# EAGLE board darwin-radio-panel3 (EAGLE 9.5.0)
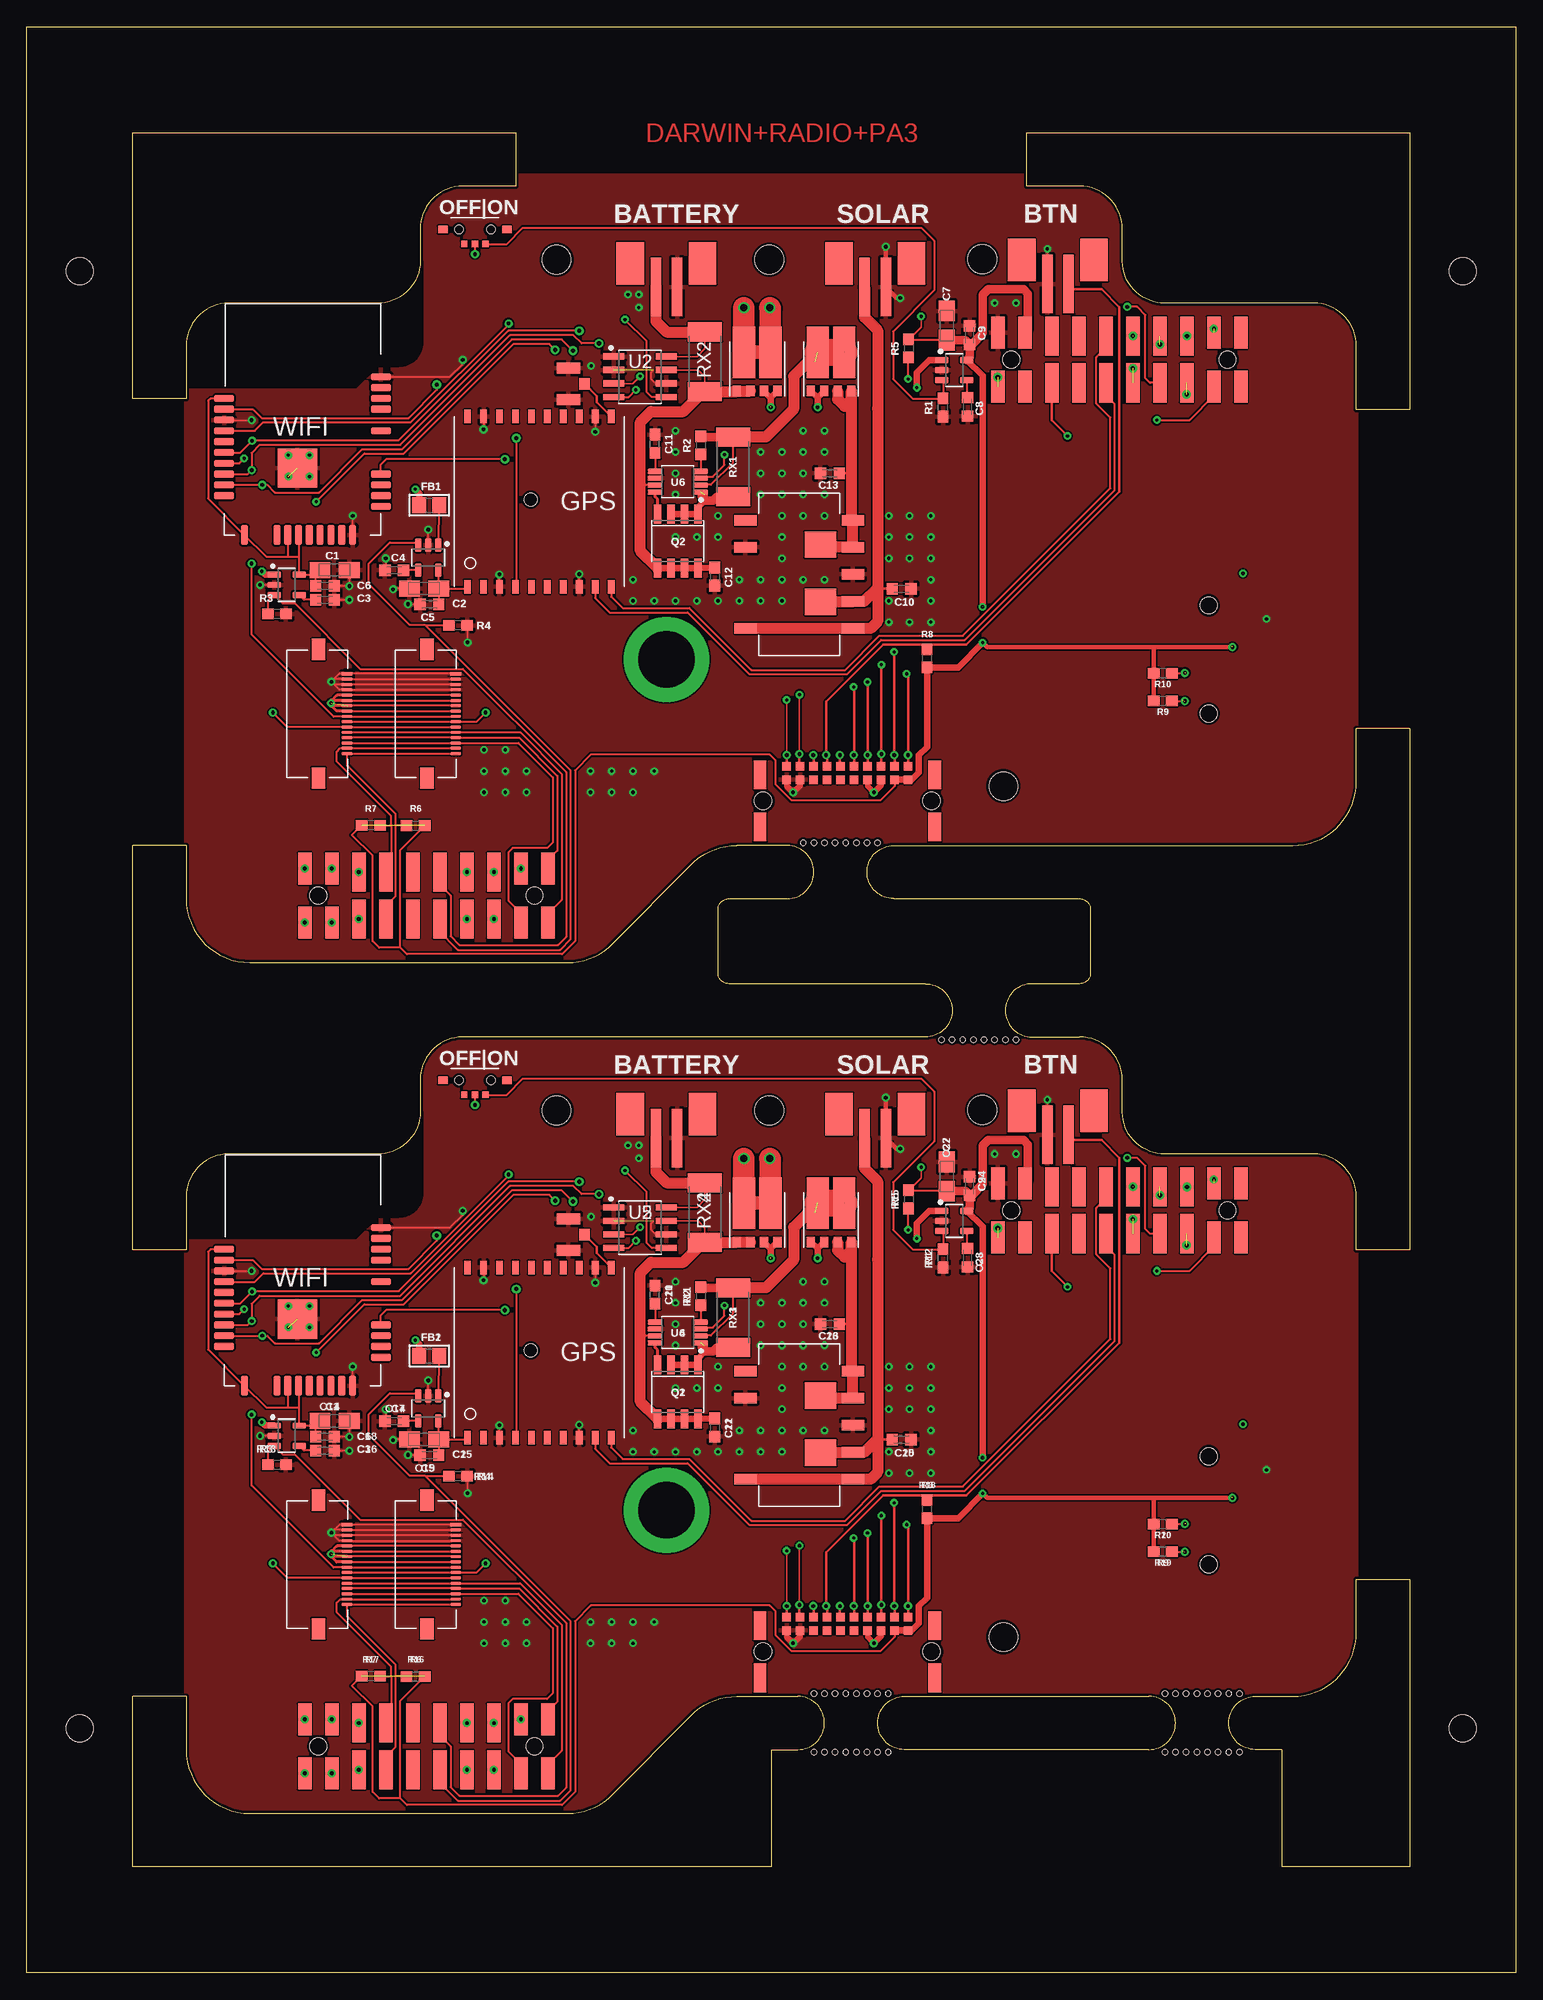
[diagram p0: board, top side]
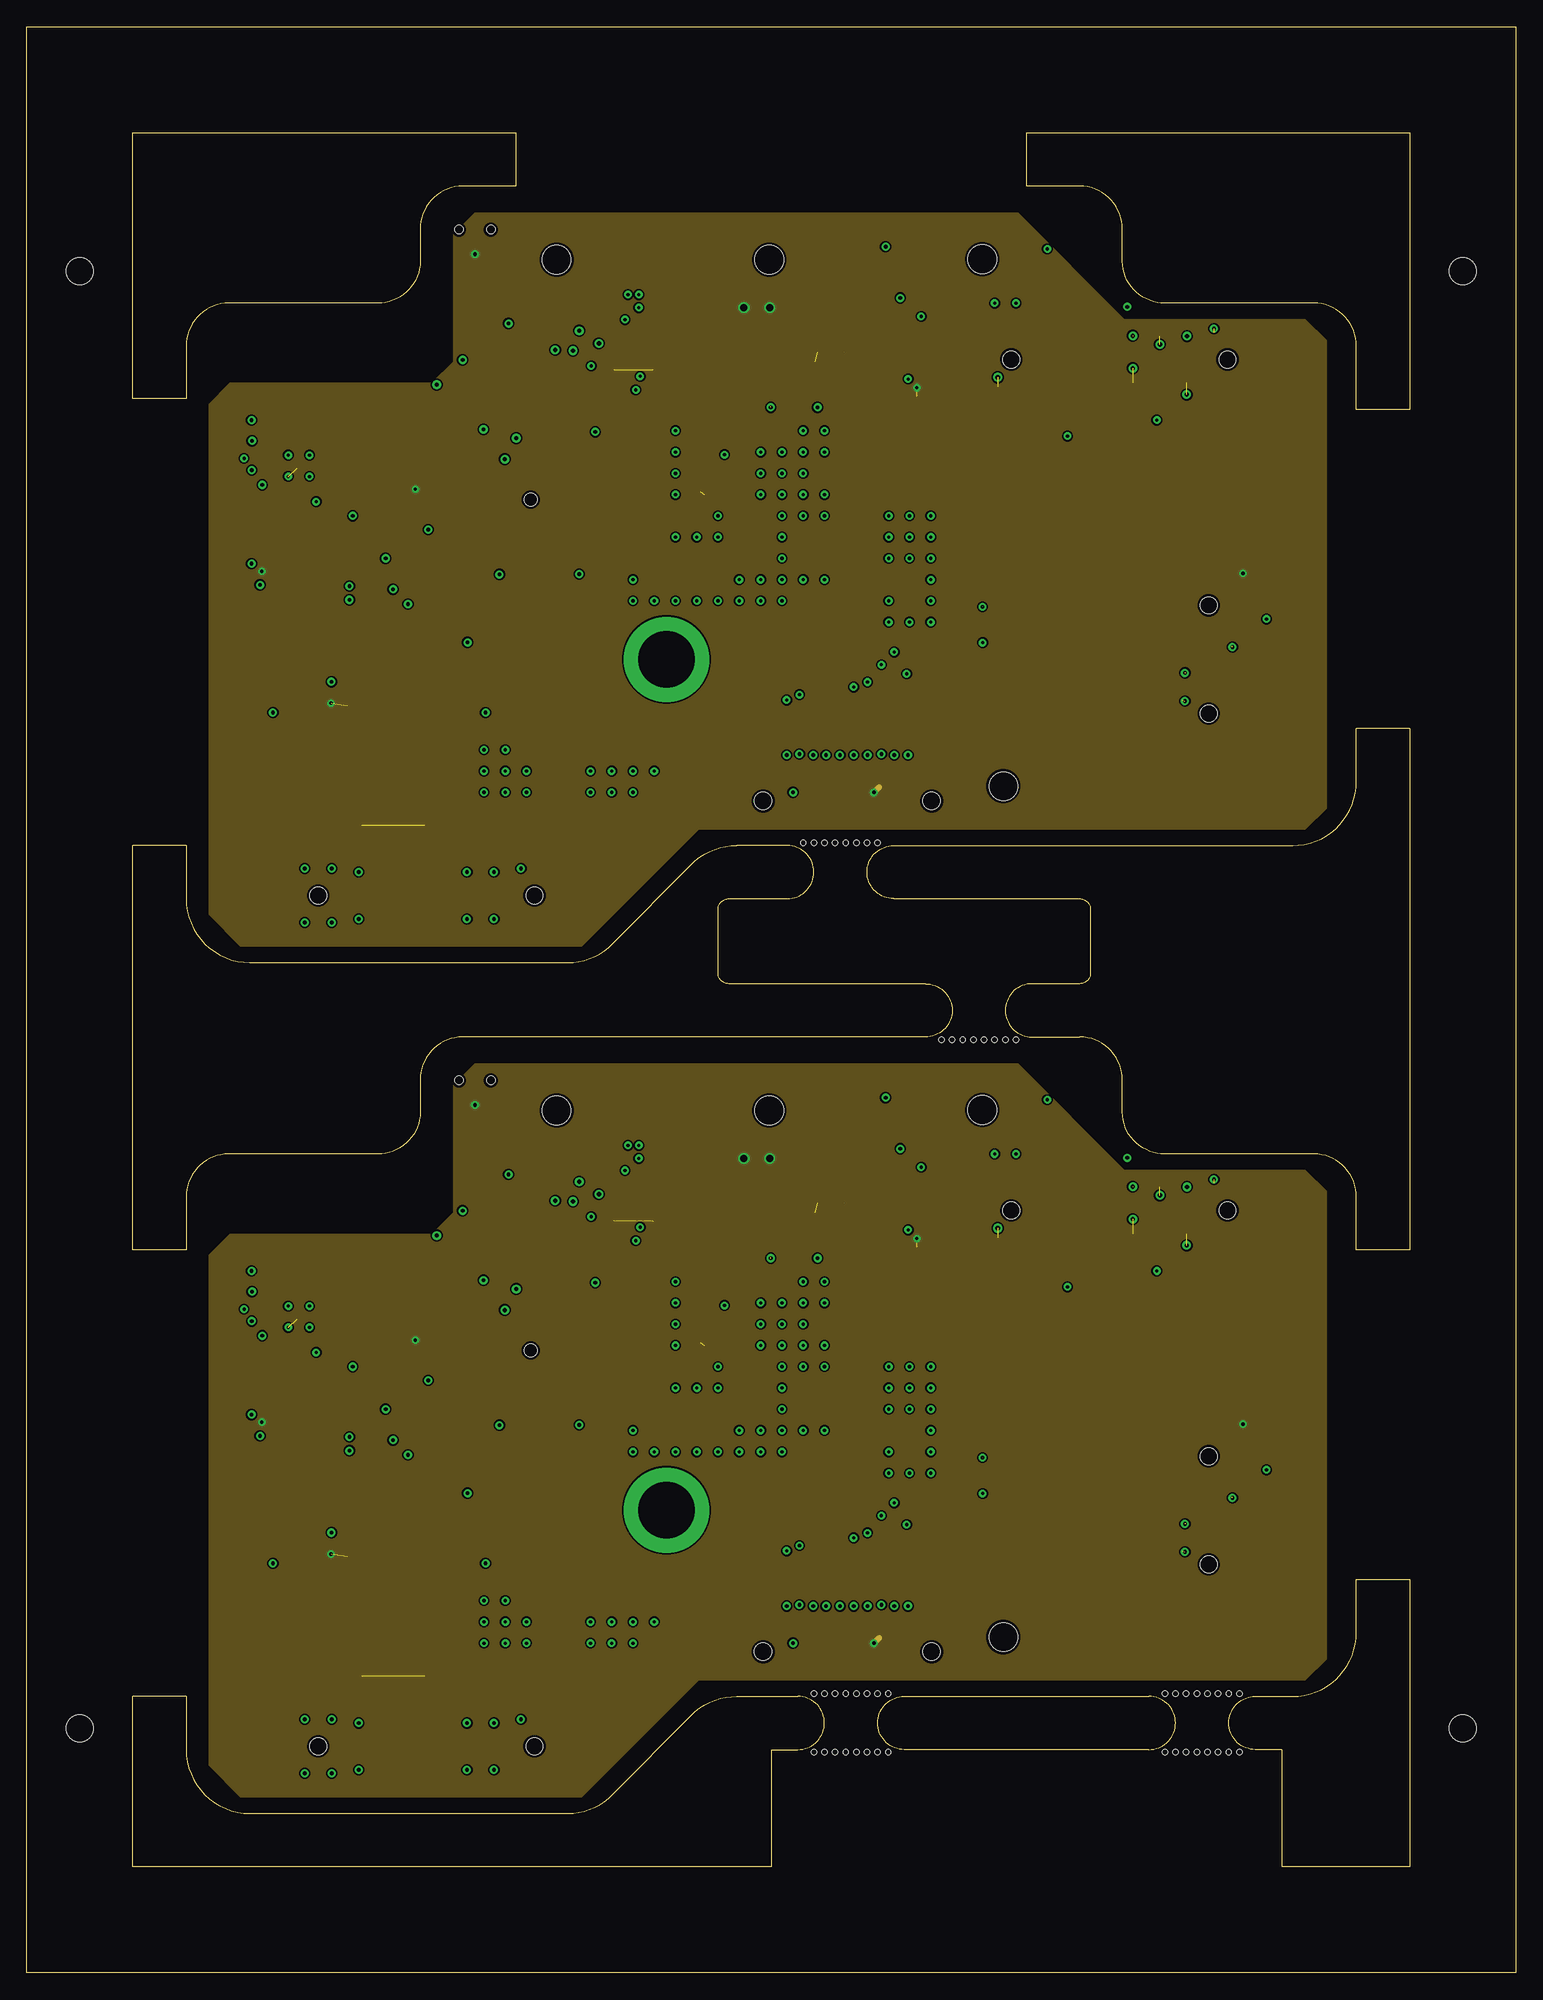
[diagram p1: board, inner layer PWR]
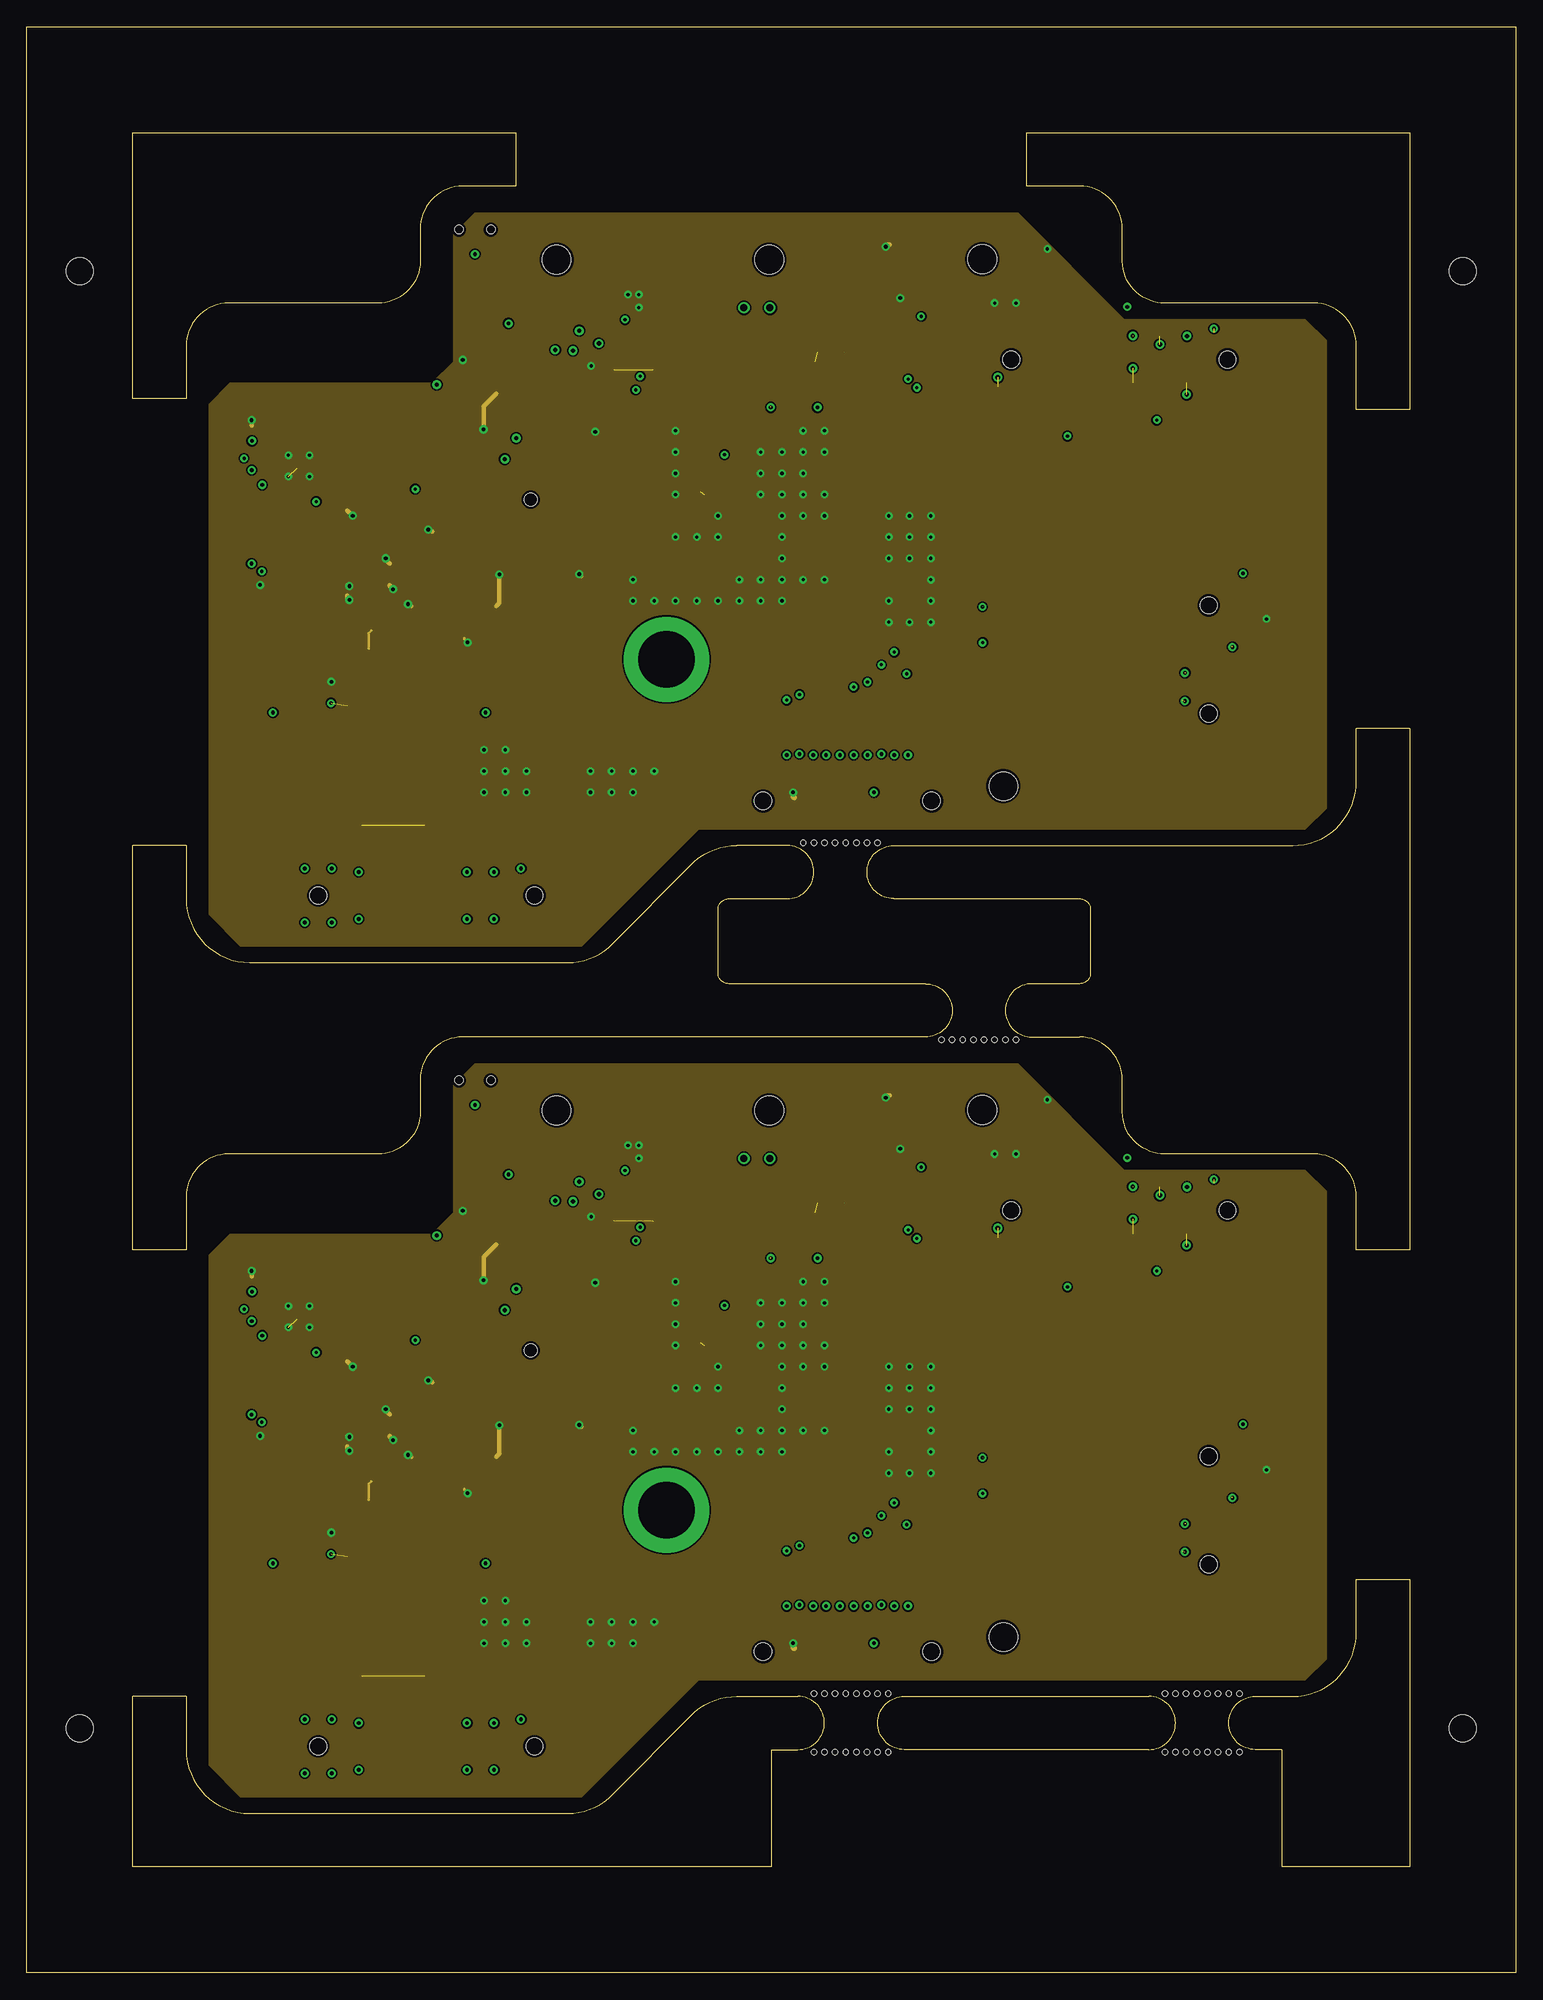
[diagram p2: board, inner layer GND]
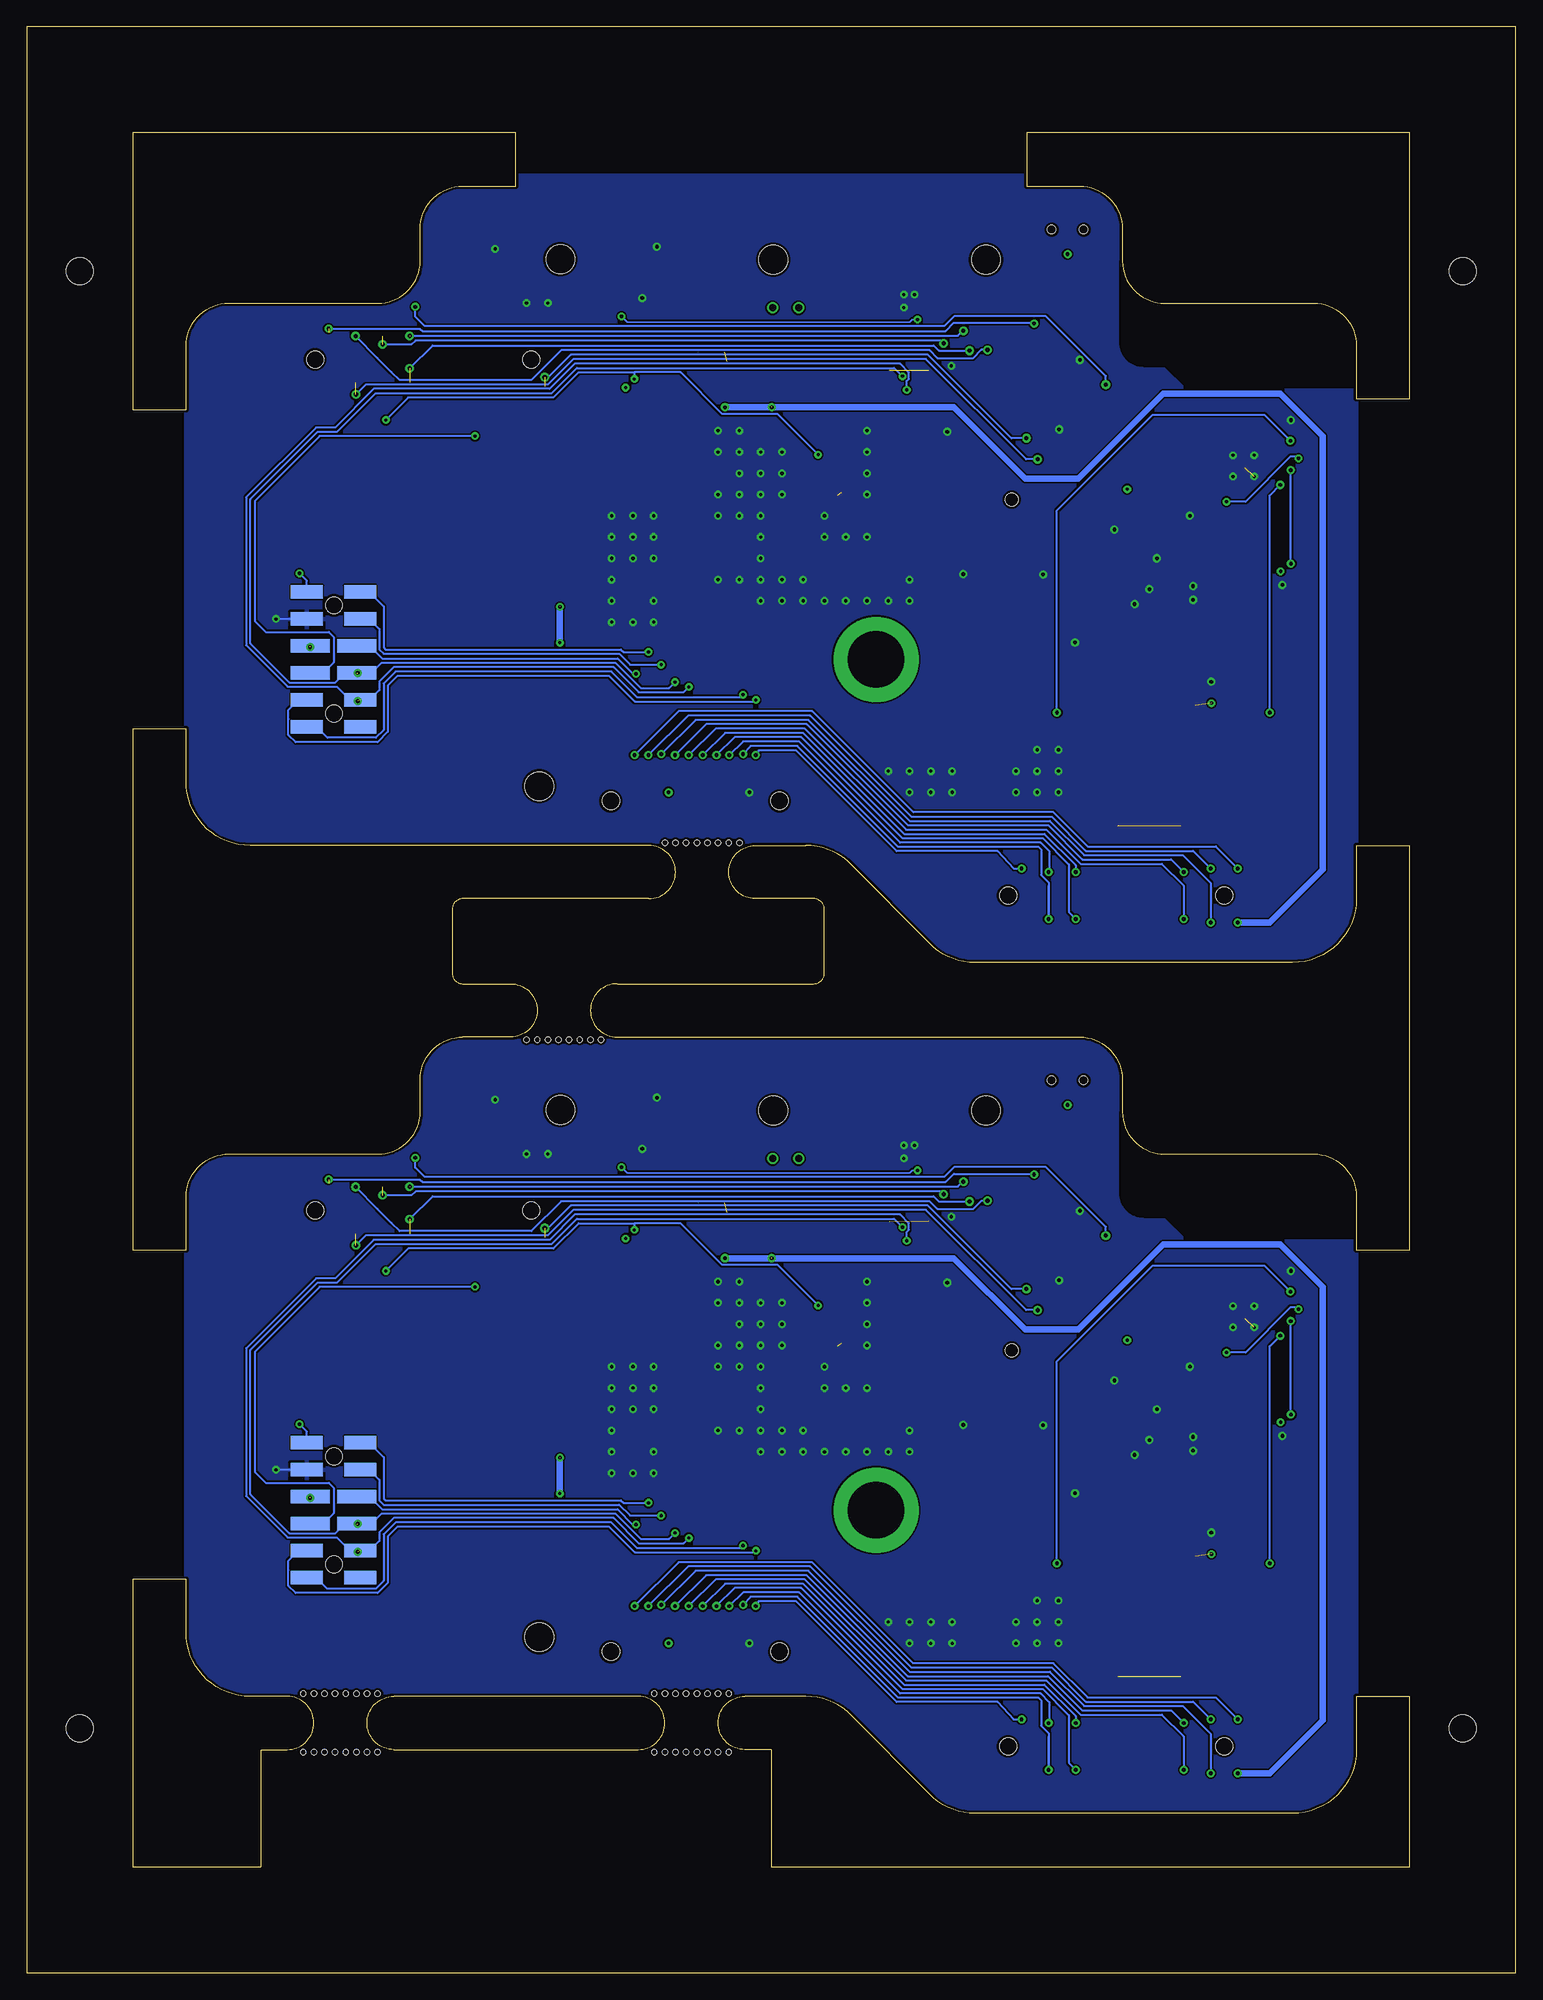
[diagram p3: board, bottom side, seen from below]

Size 140 x 183 mm. Coordinates in mm from the lower left corner, seen from the top.
Outline: 125,72.94 arc90 121,77 107,77 arc-90 103,80.94 103,83.94 arc90 99,88 94.5,88 arc-90 92,90.5 arc-90 94.5,93 99,93 arc90 100,94 100,100 arc90 99,101 81.5,101 arc-90 79,103.5 arc-90 81.5,106 119,106 arc90 125,112 125,117 130,117 130,68 125,68 125,72.94
Outline: 41,88 arc90 37,83.94 37,80.94 arc-90 33,77 19,77 arc90 15,72.94 15,68 10,68 10,106 15,106 15,101 arc90 21,95 50.85,95 arc45 55.11,96.78 62.49,104.22 arc-45 66.75,106 71.5,106 arc-90 74,103.5 arc-90 71.5,101 66,101 arc90 65,100 65,94 arc90 66,93 84.5,93 arc-90 87,90.5 arc-90 84.5,88 41,88
Outline: 15,21 arc90 21,15 50.85,15 arc45 55.11,16.78 62.49,24.23 arc-45 66.75,26 72.5,26 arc-90 75,23.5 arc-90 72.5,21 70,21 70,10 10,10 10,26 15,26 15,21
Outline: 119,26 arc90 125,32 125,37 130,37 130,10 118,10 118,21 115.5,21 arc-90 113,23.5 arc-90 115.5,26 119,26
Outline: 125,152.94 arc90 121,157 107,157 arc-90 103,160.94 103,163.94 arc90 99,168 94,168 94,173 130,173 130,147 125,147 125,152.94
Outline: 41,168 arc90 37,163.94 37,160.94 arc-90 33,157 19,157 arc90 15,152.94 15,148 10,148 10,173 46,173 46,168 41,168
Outline: 0,0 0,183 140,183 140,0 0,0
Outline: 82.5,21 arc-90 80,23.5 arc-90 82.5,26 105.5,26 arc-90 108,23.5 arc-90 105.5,21 82.5,21
Copper layers (1+2*15+16): Top 0.035mm / dielectric 1.5mm / PWR 0.035mm / dielectric 0.15mm / GND 0.035mm / dielectric 0.2mm / Bottom 0.035mm
Design rules "default *": minimum track width 6mil, minimum drill 0.3mm, track to track 6mil, track to pad 6mil, pad to pad 6mil, via to via 6mil, smd to smd 6mil, copper to edge 10mil, drill to drill 6mil, minimum pad ring 10mil, minimum via ring 8mil, stop-mask expansion 4mil, vias tented up to drill 1mm, thermal gap 10mil
Holes 2.7 mm at 49.82,81.08 69.82,81.08 89.82,81.13 49.82,161.08 69.82,161.08 89.82,161.13 49.82,161.08 69.82,161.08 89.82,161.13 91.82,111.58 49.82,81.08 69.82,81.08 89.82,81.13 91.82,31.58 49.82,161.08 69.82,161.08 89.82,161.13 91.82,111.58 49.82,81.08 69.82,81.08 89.82,81.13 91.82,31.58
Holes 2.54 mm at 5,160 135,160 135,23 5,23
Holes 0.5 mm at 73,106.25 74,106.25 75,106.25 76,106.25 77,106.25 78,106.25 79,106.25 80,106.25 93,87.75 92,87.75 91,87.75 90,87.75 89,87.75 88,87.75 87,87.75 86,87.75 74,20.75 75,20.75 76,20.75 77,20.75 78,20.75 79,20.75 80,20.75 81,20.75 74,26.25 75,26.25 76,26.25 77,26.25 78,26.25 79,26.25 80,26.25 81,26.25 107,20.75 108,20.75 109,20.75 110,20.75 111,20.75 112,20.75 113,20.75 114,20.75 107,26.25 108,26.25 109,26.25 110,26.25 111,26.25 112,26.25 113,26.25 114,26.25

## Footprints (pad centres in the part's own frame; a part is rotated, then mirrored left to right if it is on the bottom)
12PH = smd 3 x 1.27: 1 -2.5,6.35; 2 -2.5,3.81; 5 -2.5,-3.81; 6 -2.5,-6.35; 7 2.5,-6.35; 8 2.5,-3.81; 11 2.5,3.81; 12 2.5,6.35 | smd 3.68 x 1.27: 3 -2.2,1.27; 4 -2.2,-1.27; 9 2.2,-1.27; 10 2.2,1.27 | hole 1.58: 0.041,5.08; 0.041,-5.08
M55-6102042R = smd 0.8 x 0.8: P1 -5.715,3.27; P2 -4.445,3.27; P3 -3.175,3.27; P4 -1.905,3.27; P5 -0.635,3.27; P6 0.635,3.27; P7 1.905,3.27; P8 3.175,3.27; P9 4.445,3.27; P10 5.715,3.27; P11 5.715,2; P12 4.445,2; P13 3.175,2; P14 1.905,2; P15 0.635,2; P16 -0.635,2; P17 -1.905,2; P18 -3.175,2; P19 -4.445,2; P20 -5.715,2 | smd 1.2 x 2.7: PAD0 -8.21,-2.45; PAD1 8.21,-2.45; PAD2 8.21,2.45; PAD3 -8.21,2.45 | hole 1.65: -7.925,0; 7.925,0
B2B-PH-SM4-TB = smd 1 x 5.5: + -1,-1; - 1,-1 | smd 2.6 x 4: PAD1 3.4,1.25; PAD2 -3.4,1.25
A/3216-18R = smd 1.95 x 1.5: + 1.375,0; - -1.375,0
C0603K = smd 1.05 x 1.08: 1 -0.875,0; 2 0.875,0
0603 = smd 1.1 x 1: 1 -0.85,0; 2 0.85,0
V10KL45DUHM3/H = smd 0.762 x 0.991: A1-1 -1.905,0.495; A1-2 -0.635,0.495; A2-1 0.635,0.495; A2-2 1.905,0.495 | smd 2.083 x 4.851: K1 -1.245,4.153; K2 1.245,4.153
0805 = smd 1.3 x 1.5: 1 -0.95,0; 2 0.95,0
505110-1692 = smd 0.3 x 1: 1 -3.75,2.7; 2 -3.25,2.7; 3 -2.75,2.7; 4 -2.25,2.7; 5 -1.75,2.7; 6 -1.25,2.7; 7 -0.75,2.7; 8 -0.25,2.7; 9 0.25,2.7; 10 0.75,2.7; 11 1.25,2.7; 12 1.75,2.7; 13 2.25,2.7; 14 2.75,2.7; 15 3.25,2.7; 16 3.75,2.7 | smd 2 x 1.3: PAD1 -6.05,0; PAD2 6.05,0
S1911-46R = smd 2.48 x 3: P$1 -2.69,0; P$2 2.69,0
20PH = smd 3 x 1.27: PIN1 -0.34,0; PIN2 -0.34,-2.54; PIN9 -0.34,-20.32; PIN10 -0.34,-22.86; PIN11 4.74,-22.86; PIN12 4.74,-20.32; PIN19 4.74,-2.54; PIN20 4.74,0 | smd 3.68 x 1.27: PIN3 0,-5.08; PIN4 0,-7.62; PIN5 0,-10.16; PIN6 0,-12.7; PIN7 0,-15.24; PIN8 0,-17.78; PIN13 4.4,-17.78; PIN14 4.4,-15.24; PIN15 4.4,-12.7; PIN16 4.4,-10.16; PIN17 4.4,-7.62; PIN18 4.4,-5.08 | hole 1.58: 2.2,-1.27; 2.2,-21.59
SO08-IRF = smd 0.72 x 1.78: 1 -1.905,-2.543; 2 -0.635,-2.543; 3 0.635,-2.543; 4 1.905,-2.543; 5 1.905,2.543; 6 0.635,2.543; 7 -0.635,2.543; 8 -1.905,2.543
V78E06-1000-SMT-TR = smd 1 x 2.1: P$1 -5.08,-5.05; P$2 -2.54,-5.05; P$3 0,-5.05; P$4 2.54,-5.05; P$5 5.08,-5.05; P$6 5.08,5.05; P$7 2.54,5.05; P$10 -5.08,5.05
R2512 = smd 1.8 x 3.2: 1 -2.8,0; 2 2.8,0
ATWINC = smd 1.9 x 0.7: 1 7.365,2.67; 2 7.365,3.686; 3 7.365,4.702; 4 7.365,5.718; 5 7.365,9.782; 6 7.365,11.814; 7 7.365,12.83; 8 7.365,13.846; 9 7.365,14.862; 10 -7.365,12.83; 11 -7.365,11.814; 12 -7.365,10.798; 13 -7.365,9.782; 14 -7.365,8.766; 15 -7.365,7.75; 16 -7.365,6.734; 17 -7.365,5.718; 18 -7.365,4.702; 19 -7.365,3.686 | smd 0.7 x 1.9: 20 -5.465,0; 21 -2.417,0; 22 -1.401,0; 23 -0.385,0; 24 0.631,0; 25 1.647,0; 26 2.663,0; 27 3.679,0; 28 4.695,0 | smd 3.7 x 3.7: PAD -0.485,6.27
SOIC127P599X175-8N = smd 1.965 x 0.602: 1 -2.47,1.905; 2 -2.47,0.635; 3 -2.47,-0.635; 4 -2.47,-1.905; 5 2.47,-1.905; 6 2.47,-0.635; 7 2.47,0.635; 8 2.47,1.905
SOP65P490X110-8 = smd 1.412 x 0.492: 1 -2.15,0.975; 2 -2.15,0.325; 3 -2.15,-0.325; 4 -2.15,-0.975; 5 2.15,-0.975; 6 2.15,-0.325; 7 2.15,0.325; 8 2.15,0.975
GPS_MODULE = smd 1.27 x 0.635: P$1 -8,6.75; P$2 -8,5.25; P$3 -8,3.75; P$4 -8,2.25; P$5 -8,0.75; P$6 -8,-0.75; P$7 -8,-2.25; P$8 -8,-3.75; P$9 -8,-5.25; P$10 -8,-6.75; P$11 8,-6.75; P$12 8,-5.25; P$13 8,-3.75; P$14 8,-2.25; P$15 8,-0.75; P$16 8,0.75; P$17 8,2.25; P$18 8,3.75; P$19 8,5.25; P$20 8,6.75 | hole 1.2: 0.2,0.8
SOT95P280X145-5 = smd 1.262 x 0.609: 1 -1.175,0.95; 2 -1.175,0; 3 -1.175,-0.95; 4 1.175,-0.95; 5 1.175,0.95
SSAJ110100 = smd 0.6 x 0.6: 1 1,1.355; 2 -1,1.355; C 0,1.355 | smd 0.9 x 0.7: PAD -3,0; PAD2 3,0 | hole 0.8: -1.5,0; 1.5,0
2337019-1 = smd 1.05 x 1: ANT 0,-1.525 | smd 1.05 x 2.2: GND -1.475,0; GND2 1.475,0

## Placement (x,y rotation side)
BACKPACK  2X6-HEADERSDS  [12PH]  111.15,123.5 0 bottom
BACKPACK1  2X6-HEADERSDS  [12PH]  111.15,43.5 0 bottom
BACKPLANE  M55-6102042R  [M55-6102042R]  77.15,110.2 0 top
BACKPLANE1  M55-6102042R  [M55-6102042R]  77.15,30.2 0 top
BAT-JST  B2B-PH-SM4-TB  [B2B-PH-SM4-TB]  60.15,159.5 0 top
BAT-JST1  B2B-PH-SM4-TB  [B2B-PH-SM4-TB]  60.15,79.5 0 top
BTN-JST  B2B-PH-SM4-TB  [B2B-PH-SM4-TB]  96.95,159.8 0 top
BTN-JST1  B2B-PH-SM4-TB  [B2B-PH-SM4-TB]  96.95,79.8 0 top
C1  6.8uf  [A/3216-18R]  28.94,131.91 180 top
C2  6.8uf  [A/3216-18R]  37.36,130.17 0 top
C3  470pf  [C0603K]  28.04,129.11 0 top
C4  470pf  [C0603K]  34.56,131.87 180 top
C5  .1uf  [C0603K]  37.86,128.67 180 top
C6  .1uf  [C0603K]  28.04,130.41 0 top
C7  6.8uf  [A/3216-18R]  86.5,154.88 270 top
C8  470pf  [C0603K]  88.45,147.24 270 top
C9  .1uf  [C0603K]  88.64,153.98 90 top
C10  22uf  [C0603K]  82.26,130.15 0 top
C11  0.1uF  [0603]  59.07,143.77 90 top
C12  10uF  [0603]  64.68,131.28 270 top
C13  22uf  [C0603K]  75.5,141 180 top
C14  6.8uf  [A/3216-18R]  28.94,51.91 180 top
C15  6.8uf  [A/3216-18R]  37.36,50.17 0 top
C16  470pf  [C0603K]  28.04,49.11 0 top
C17  470pf  [C0603K]  34.56,51.87 180 top
C18  .1uf  [C0603K]  28.04,50.41 0 top
C19  .1uf  [C0603K]  37.86,48.67 180 top
C20  0.1uF  [0603]  59.07,63.77 90 top
C21  10uF  [0603]  64.68,51.28 270 top
C22  6.8uf  [A/3216-18R]  86.5,74.88 270 top
C23  470pf  [C0603K]  88.45,67.24 270 top
C24  .1uf  [C0603K]  88.64,73.98 90 top
C25  22uf  [C0603K]  82.26,50.15 0 top
C26  22uf  [C0603K]  75.5,61 180 top
D1  V10KL45DUHM3/H  [V10KL45DUHM3/H]  68.68,148.23 0 top
D2  V10KL45DUHM3/H  [V10KL45DUHM3/H]  68.68,68.23 0 top
D3  V10KL45DUHM3/H  [V10KL45DUHM3/H]  75.61,148.23 0 top
D4  V10KL45DUHM3/H  [V10KL45DUHM3/H]  75.61,68.23 0 top
FB1  [0805]  37.85,138 0 top
FB2  [0805]  37.85,58 0 top
FFC1  505110-1692  [505110-1692]  27.43,118.4 270 top
FFC2  505110-1692  [505110-1692]  37.64,118.4 270 top
FFC3  505110-1692  [505110-1692]  27.43,38.4 270 top
FFC4  505110-1692  [505110-1692]  37.64,38.4 270 top
J1  S1911-46R  [S1911-46R]  74.63,131.6 270 top
J2  S1911-46R  [S1911-46R]  74.63,51.6 270 top
LOWER1  MOLEX-15-91-2200  [20PH]  49.01,103.5 270 top
LOWER2  MOLEX-15-91-2200  [20PH]  49.01,23.5 270 top
Q1  NDS8434  [SO08-IRF]  61.22,54.62 180 top
Q2  NDS8434  [SO08-IRF]  61.22,134.62 180 top
R1  100k  [0603]  86.15,147.18 90 top
R2  100k  [0603]  63.37,143.62 270 top
R3  100k  [0603]  23.53,127.78 180 top
R4  100k  [0603]  40.55,126.7 180 top
R5  100k  [0603]  82.91,152.73 270 top
R6  100k  [0603]  36.57,107.87 0 top
R7  100k  [0603]  32.36,107.9 180 top
R8  100k  [0603]  84.65,123.6 90 top
R9  100k  [0603]  106.8,119.6 180 top
R10  100k  [0603]  106.8,122.2 180 top
R11  100k  [0603]  63.37,63.62 270 top
R12  100k  [0603]  86.15,67.18 90 top
R13  100k  [0603]  23.53,47.78 180 top
R14  100k  [0603]  40.55,46.7 180 top
R15  100k  [0603]  82.91,72.73 270 top
R16  100k  [0603]  36.57,27.87 0 top
R17  100k  [0603]  32.36,27.9 180 top
R18  100k  [0603]  84.65,43.6 90 top
R19  100k  [0603]  106.8,39.6 180 top
R20  100k  [0603]  106.8,42.2 180 top
REG1  V78E06-1000-SMT-TR  [V78E06-1000-SMT-TR]  72.63,131.5 90 top
REG2  V78E06-1000-SMT-TR  [V78E06-1000-SMT-TR]  72.63,51.5 90 top
RX1  100M  [R2512]  66.41,141.61 270 top
RX2  100M  [R2512]  63.77,151.49 90 top
RX3  100M  [R2512]  66.41,61.61 270 top
RX4  100M  [R2512]  63.77,71.49 90 top
SOLAR-JST  B2B-PH-SM4-TB  [B2B-PH-SM4-TB]  79.78,159.5 0 top
SOLAR-JST1  B2B-PH-SM4-TB  [B2B-PH-SM4-TB]  79.78,79.5 0 top
U1  ATWINC  [ATWINC]  25.94,135.21 0 top
U2  INA219  [SOIC127P599X175-8N]  57.67,150.07 0 top
U3  ATWINC  [ATWINC]  25.94,55.21 0 top
U4  MCP7384X  [SOP65P490X110-8]  61.22,60.21 180 top
U5  INA219  [SOIC127P599X175-8N]  57.67,70.07 0 top
U6  MCP7384X  [SOP65P490X110-8]  61.22,140.21 180 top
U$1  FGPMMOPA6H  [GPS_MODULE]  48.2,138.33 90 top
U$2  MIC5219-3.3YM5-TR  [SOT95P280X145-5]  37.76,133.07 270 top
U$3  MIC5219-3.3YM5-TR  [SOT95P280X145-5]  24.44,130.51 0 top
U$4  MIC5219-3.3YM5-TR  [SOT95P280X145-5]  87.2,150.7 0 top
U$5  SSAJ110100  [SSAJ110100]  42.14,163.92 180 top
U$6  FGPMMOPA6H  [GPS_MODULE]  48.2,58.33 90 top
U$7  MIC5219-3.3YM5-TR  [SOT95P280X145-5]  37.76,53.07 270 top
U$8  MIC5219-3.3YM5-TR  [SOT95P280X145-5]  24.44,50.51 0 top
U$9  MIC5219-3.3YM5-TR  [SOT95P280X145-5]  87.2,70.7 0 top
U$10  SSAJ110100  [SSAJ110100]  42.14,83.92 180 top
U$11  2337019-1  [2337019-1]  50.93,149.41 90 top
U$12  2337019-1  [2337019-1]  50.93,69.41 90 top
UPPER1  MOLEX-15-91-2200  [20PH]  91.29,149.5 90 top
UPPER2  MOLEX-15-91-2200  [20PH]  91.29,69.5 90 top

## Library data of the parts
BACKPACK BACKPACK1 BACKPLANE BACKPLANE1 BAT-JST BAT-JST1 BTN-JST BTN-JST1 D1-D4 FFC1-FFC4 J1 J2 LOWER1 LOWER2 Q1 Q2 REG1 REG2 SOLAR-JST SOLAR-JST1 U1-U6 U$1-U$12 UPPER1 UPPER2 = Conservify
C1-C10 C13-C19 C22-C26 = rcl; SPICEPREFIX: C
C11 C20 = SparkFun-Capacitors; PROD_ID: CAP-00810
C12 C21 = SparkFun-Capacitors; PROD_ID: CAP-11015
FB1 FB2 = microbuilder
R1-R20 = SparkFun-Resistors; PROD_ID: RES-07828
RX1-RX4 = rcl; SPICEPREFIX: R

## Nets
3V1: BACKPACK1.3 BACKPLANE1.P11 BACKPLANE1.P12 C22.+ C24.1 R15.1 R16.2 R17.2 R18.1 R19.2 R20.2 U5.5 U$9.5 UPPER2.PIN19
3V3: BACKPACK.3 BACKPLANE.P11 BACKPLANE.P12 C7.+ C9.1 R5.1 R6.2 R7.2 R8.1 R9.2 R10.2 U2.5 U$4.5 UPPER1.PIN19
BACKPACK_ENABLE: BACKPACK.4 UPPER1.PIN3
BACKPACK_ENABLE1: BACKPACK1.4 UPPER2.PIN3
BAT+: C12.1 D1.A1-1 D1.A1-2 Q2.5 Q2.6 Q2.7 Q2.8 RX2.1 U2.7 U6.7
BAT+1: C21.1 D2.A1-1 D2.A1-2 Q1.5 Q1.6 Q1.7 Q1.8 RX4.1 U4.7 U5.7
BAT+RAW: BAT-JST.+ RX2.2 U2.8
BAT+RAW1: BAT-JST1.+ RX4.2 U5.8
CHARGESUPPLY: D3.K1 D3.K2 R2.1 RX1.1 U6.2
CHARGESUPPLY1: D4.K1 D4.K2 R11.1 RX3.1 U4.2
CHARGING: R5.2 U6.3 UPPER1.PIN9
CHARGING1: R15.2 U4.3 UPPER2.PIN9
D+: LOWER1.PIN6
D+1: LOWER2.PIN6
D-: LOWER1.PIN15
D-1: LOWER2.PIN15
EEPROM_PROT: BACKPACK.5 BACKPLANE.P1 LOWER1.PIN2
EEPROM_PROT1: BACKPACK1.5 BACKPLANE1.P1 LOWER2.PIN2
GND: BACKPACK.2 BACKPLANE.P19 BACKPLANE.P20 BAT-JST.- BTN-JST.+ C1.- C2.- C3.2 C4.2 C5.2 C6.2 C7.- C8.2 C9.2 C10.2 C11.2 C12.2 C13.2 FFC1.1 FFC1.2 FFC1.3 FFC1.4 FFC2.1 FFC2.2 FFC2.3 FFC2.4 R1.1 R3.1 R4.1 REG1.P$3 REG1.P$7 SOLAR-JST.- U1.9 U1.12 U1.28 U1.PAD U2.1 U2.2 U2.6 U6.6 U$1.P$3 U$1.P$8 U$1.P$12 U$1.P$19 U$2.2 U$3.2 U$4.2 U$11.GND U$11.GND2 UPPER1.PIN20
GND2: BACKPACK1.2 BACKPLANE1.P19 BACKPLANE1.P20 BAT-JST1.- BTN-JST1.+ C14.- C15.- C16.2 C17.2 C18.2 C19.2 C20.2 C21.2 C22.- C23.2 C24.2 C25.2 C26.2 FFC3.1 FFC3.2 FFC3.3 FFC3.4 FFC4.1 FFC4.2 FFC4.3 FFC4.4 R12.1 R13.1 R14.1 REG2.P$3 REG2.P$7 SOLAR-JST1.- U3.9 U3.12 U3.28 U3.PAD U4.6 U5.1 U5.2 U5.6 U$6.P$3 U$6.P$8 U$6.P$12 U$6.P$19 U$7.2 U$8.2 U$9.2 U$12.GND U$12.GND2 UPPER2.PIN20
GPS_ENABLE: LOWER1.PIN16 R4.2 U$2.3
GPS_ENABLE1: LOWER2.PIN16 R14.2 U$7.3
GPS_RX: U$1.P$9 UPPER1.PIN5
GPS_RX1: U$6.P$9 UPPER2.PIN5
GPS_TX: U$1.P$10 UPPER1.PIN16
GPS_TX1: U$6.P$10 UPPER2.PIN16
HOTSWAP_INT: BACKPLANE.P3 LOWER1.PIN3
HOTSWAP_INT1: BACKPLANE1.P3 LOWER2.PIN3
MOD_G0: FFC1.13 FFC2.13 LOWER1.PIN1
MOD_G1: FFC3.13 FFC4.13 LOWER2.PIN1
MOD_G2: BACKPACK.6 BACKPLANE.P2 LOWER1.PIN18
MOD_G3: BACKPACK1.6 BACKPLANE1.P2 LOWER2.PIN18
MOD_G4: BACKPLANE1.P5 LOWER2.PIN4
MOD_G5: BACKPLANE.P5 LOWER1.PIN4
MOD_G6: FFC3.14 FFC4.14 LOWER2.PIN19
MOD_G7: FFC3.12 FFC4.12 LOWER2.PIN20
MOD_G13: FFC1.14 FFC2.14 LOWER1.PIN19
MOD_G14: FFC1.12 FFC2.12 LOWER1.PIN20
MOD_MISO: BACKPACK.10 BACKPLANE.P10 LOWER1.PIN10
MOD_MISO1: BACKPACK1.10 BACKPLANE1.P10 LOWER2.PIN10
MOD_MOSI: BACKPACK.11 BACKPLANE.P8 LOWER1.PIN12
MOD_MOSI1: BACKPACK1.11 BACKPLANE1.P8 LOWER2.PIN12
MOD_SCK: BACKPACK.12 BACKPLANE.P9 LOWER1.PIN9
MOD_SCK1: BACKPACK1.12 BACKPLANE1.P9 LOWER2.PIN9
MOD_SCL: BACKPACK.8 BACKPLANE.P6 LOWER1.PIN13 R9.1 U2.4
MOD_SCL1: BACKPACK1.8 BACKPLANE1.P6 LOWER2.PIN13 R19.1 U5.4
MOD_SDA: BACKPACK.9 BACKPLANE.P7 LOWER1.PIN8 R10.1 U2.3
MOD_SDA1: BACKPACK1.9 BACKPLANE1.P7 LOWER2.PIN8 R20.1 U5.3
N$1: C3.1 U$3.4
N$2: C4.1 U$2.4
N$3: C2.+ C5.1 U$1.P$1 U$2.5
N$4: U$1.P$11 U$11.ANT
N$5: R2.2 U6.4
N$6: C8.1 U$4.4
N$7: FB1.2 U$2.1
N$8: R1.2 U$4.3 U$5.2
N$11: C16.1 U$8.4
N$12: C17.1 U$7.4
N$13: C15.+ C19.1 U$6.P$1 U$7.5
N$14: Q2.1 Q2.2 Q2.3 RX1.2 U6.1
N$16: Q1.1 Q1.2 Q1.3 RX3.2 U4.1
N$17: Q2.4 U6.8
N$18: C11.1 U6.5
N$19: Q1.4 U4.8
N$20: C20.1 U4.5
N$21: R11.2 U4.4
N$22: C23.1 U$9.4
N$23: R12.2 U$9.3 U$10.2
N$24: U$6.P$11 U$12.ANT
N$25: FB2.2 U$7.1
PIN1: BACKPACK1.7
PIN7: BACKPACK.7
RAD_SCL: FFC1.16 FFC2.16 LOWER1.PIN14 R6.1
RAD_SCL1: FFC3.16 FFC4.16 LOWER2.PIN14 R16.1
RAD_SDA: FFC1.15 FFC2.15 LOWER1.PIN7 R7.1
RAD_SDA1: FFC3.15 FFC4.15 LOWER2.PIN7 R17.1
RADIO_MISO: FFC1.9 FFC2.9 U1.17 UPPER1.PIN14
RADIO_MISO1: FFC3.9 FFC4.9 U3.17 UPPER2.PIN14
RADIO_MOSI: FFC1.10 FFC2.10 U1.15 UPPER1.PIN15
RADIO_MOSI1: FFC3.10 FFC4.10 U3.15 UPPER2.PIN15
RADIO_SCK: FFC1.11 FFC2.11 U1.18 UPPER1.PIN6
RADIO_SCK1: FFC3.11 FFC4.11 U3.18 UPPER2.PIN6
RESET: UPPER1.PIN4
RESET1: UPPER2.PIN4
SOL+: C10.1 J1.P$2 REG1.P$1 REG1.P$2 REG1.P$10 SOLAR-JST.+
SOL+1: C25.1 J2.P$2 REG2.P$1 REG2.P$2 REG2.P$10 SOLAR-JST1.+
SOLREG: C13.1 D3.A2-1 D3.A2-2 J1.P$1 REG1.P$4 REG1.P$5
SOLREG1: C26.1 D4.A2-1 D4.A2-2 J2.P$1 REG2.P$4 REG2.P$5
SWCLK: UPPER1.PIN10
SWCLK1: UPPER2.PIN10
SWDIO: UPPER1.PIN11
SWDIO1: UPPER2.PIN11
UNREG: BACKPACK.1 BACKPLANE.P13 BACKPLANE.P14 D1.K1 D1.K2 FB1.1 FFC1.5 FFC1.6 FFC1.7 FFC1.8 FFC2.5 FFC2.6 FFC2.7 FFC2.8 U$3.1 U$4.1 U$5.C
UNREG1: BACKPACK1.1 BACKPLANE1.P13 BACKPLANE1.P14 D2.K1 D2.K2 FB2.1 FFC3.5 FFC3.6 FFC3.7 FFC3.8 FFC4.5 FFC4.6 FFC4.7 FFC4.8 U$8.1 U$9.1 U$10.C
V1: D2.A2-1 D2.A2-2 D4.A1-1 D4.A1-2 LOWER2.PIN11
V5: D1.A2-1 D1.A2-2 D3.A1-1 D3.A1-2 LOWER1.PIN11
VBACKUP: U$1.P$4 UPPER1.PIN1
VBACKUP1: U$6.P$4 UPPER2.PIN1
WIFI_3V1: C14.+ C18.1 U3.10 U3.20 U3.22 U3.23 U$8.5
WIFI_3V3: C1.+ C6.1 U1.10 U1.20 U1.22 U1.23 U$3.5
WIFI_CS: U1.16 UPPER1.PIN13
WIFI_CS1: U3.16 UPPER2.PIN13
WIFI_ENABLE: LOWER1.PIN5 R3.2 U$3.3
WIFI_ENABLE1: LOWER2.PIN5 R13.2 U$8.3
WIFI_IRQ: U1.13 UPPER1.PIN12
WIFI_IRQ1: U3.13 UPPER2.PIN12
WIFI_RST: U1.4 UPPER1.PIN8
WIFI_RST1: U3.4 UPPER2.PIN8
WIFI_WAKE: U1.11 UPPER1.PIN7
WIFI_WAKE1: U3.11 UPPER2.PIN7
X1: UPPER2.PIN2
X2: UPPER1.PIN2
X3: UPPER2.PIN17
X4: UPPER1.PIN17
X5: UPPER1.PIN18
X6: UPPER2.PIN18
XBTN: BACKPLANE.P4 BTN-JST.- LOWER1.PIN17 R8.2
XBTN1: BACKPLANE1.P4 BTN-JST1.- LOWER2.PIN17 R18.2
XX1: BACKPLANE.P18
XX2: BACKPLANE.P17
XX3: BACKPLANE.P16
XX4: BACKPLANE.P15
XX5: BACKPLANE1.P16
XX6: BACKPLANE1.P18
XX7: BACKPLANE1.P17
XX8: BACKPLANE1.P15

## Tracks (layer width: path | path; a pad name or v marks a point on that pad's centre or on a via)
3V1  (via drill 0.3, 0.35)  (3 unrouted)
  Top 0.152: v84.09,75.76 84.09,74.76 R15.1
  Top 0.203: R15.1 86.43,73.58 C22.+ | BACKPLANE1.P12 81.59,31.61 80.23,30.24 71.92,30.24 70.41,31.75 70.41,33.99 69.84,34.55 53.05,34.55 51.56,33.06 51.56,17.02 50.33,15.79 35.74,15.79 35.13,16.41 33.13,16.41 32.52,17.02 32.52,25.05 30.59,26.98 R17.2 | 35.09,16.42 35.09,25.54 R16.2 | U5.5 58.77,68.16 58.29,68.65 58.29,73.41 v56.25,75.45
  Top 0.406: v113.35,44.67 106.03,44.67 | 106.03,44.67 90.28,44.67 v89.88,45.07 | R19.2 R20.2 105.95,44.58 106.03,44.67
  Top 0.61: U$9.5 89.86,70.17 v89.86,48.45 | v89.88,45.07 87.55,42.75 R18.1 84.65,35.27 83.89,34.51 83.89,32.88 83.2,32.2 BACKPLANE1.P11 BACKPLANE1.P12
  Top 0.813: C22.+ 88.23,73.51 C24.1 | C24.1 88.64,71.91 U$9.5 | C24.1 88.84,73.11 89.89,74.16 89.89,77.8 90.42,78.32 93.71,78.32 94.13,77.9 94.13,74.54 UPPER2.PIN19
  Bottom 0.152: v56.25,75.45 56.76,75.45 56.99,75.22 83.56,75.22 v84.09,75.76
  Bottom 0.61: v89.86,48.45 89.88,48.43 v89.88,45.07
3V3  (via drill 0.3, 0.35)  (3 unrouted)
  Top 0.152: v84.09,155.76 84.09,154.76 R5.1
  Top 0.203: R5.1 86.43,153.58 C7.+ | BACKPLANE.P12 81.59,111.61 80.23,110.24 71.92,110.24 70.41,111.75 70.41,113.99 69.84,114.55 53.05,114.55 51.56,113.06 51.56,97.02 50.33,95.79 35.74,95.79 35.13,96.41 33.13,96.41 32.52,97.02 32.52,105.05 30.59,106.98 R7.2 | 35.09,96.42 35.09,105.54 R6.2 | U2.5 58.77,148.16 58.29,148.65 58.29,153.41 v56.25,155.45
  Top 0.406: v113.35,124.67 106.03,124.67 | 106.03,124.67 90.28,124.67 v89.88,125.07 | R9.2 R10.2 105.95,124.58 106.03,124.67
  Top 0.61: U$4.5 89.86,150.17 v89.86,128.45 | v89.88,125.07 87.55,122.75 R8.1 84.65,115.27 83.89,114.51 83.89,112.88 83.2,112.2 BACKPLANE.P11 BACKPLANE.P12
  Top 0.813: C7.+ 88.23,153.51 C9.1 | C9.1 88.64,151.91 U$4.5 | C9.1 88.84,153.11 89.89,154.16 89.89,157.8 90.42,158.32 93.71,158.32 94.13,157.9 94.13,154.54 UPPER1.PIN19
  Bottom 0.152: v56.25,155.45 56.76,155.45 56.99,155.22 83.56,155.22 v84.09,155.76
  Bottom 0.61: v89.86,128.44 89.88,128.43 v89.88,125.07
BACKPACK_ENABLE  (via drill 0.3)
  Top 0.254: UPPER1.PIN3 96.37,145.98 v97.85,144.5
  Bottom 0.203: v97.85,144.5 112.45,144.5 118.55,138.4 118.55,127.1 117.53,126.08 111.59,126.08 111.13,125.62 111.13,123.22 112,122.35 113.23,122.35 BACKPACK.4
BACKPACK_ENABLE1  (via drill 0.3)
  Top 0.254: UPPER2.PIN3 96.37,65.98 v97.85,64.5
  Bottom 0.203: v97.85,64.5 112.45,64.5 118.55,58.4 118.55,47.1 117.53,46.08 111.59,46.08 111.13,45.62 111.13,43.22 112,42.35 113.23,42.35 BACKPACK1.4
BAT+
  Top 0.152: U2.7 63.13,150.7 63.77,150.07 RX2.1
  Top 0.203: U6.7 59.05,139.91 57.7,139.91
  Top 0.61: C12.1 Q2.8 Q2.7 Q2.6 Q2.5
  Top 1.016: Q2.5 57.7,133.69 57.7,139.91 57.7,145.83 58.69,146.82 61.74,146.82 63.61,148.69 RX2.1 66.74,148.69 D1.A1-1 D1.A1-2
BAT+1
  Top 0.152: U5.7 63.13,70.7 63.77,70.07 RX4.1
  Top 0.203: U4.7 59.05,59.91 57.7,59.91
  Top 0.61: C21.1 Q1.8 Q1.7 Q1.6 Q1.5
  Top 1.016: Q1.5 57.7,53.69 57.7,59.91 57.7,65.83 58.69,66.82 61.74,66.82 63.61,68.69 RX4.1 66.74,68.69 D2.A1-1 D2.A1-2
BAT+RAW
  Top 0.152: U2.8 63.03,151.97 63.77,152.71 RX2.2
  Top 1.016: BAT-JST.+ 59.15,155.29 60.16,154.29 RX2.2
BAT+RAW1
  Top 0.152: U5.8 63.03,71.97 63.77,72.71 RX4.2
  Top 1.016: BAT-JST1.+ 59.15,75.3 60.16,74.29 RX4.2
CHARGESUPPLY  (2 unrouted)
  Top 0.203: U6.2 63.42,139.93 64.33,139.93 66.41,142.01 RX1.1
  Top 0.813: RX1.1 63.44,144.41 R2.1
  Top 1.016: 74.15,151.5 74.15,153.5 | D3.K1 72.1,150.11 72.1,147.02 69.49,144.41 RX1.1
  Top 2.54: D3.K1 76.85,152.38
CHARGESUPPLY1  (2 unrouted)
  Top 0.203: U4.2 63.42,59.93 64.33,59.93 66.41,62.01 RX3.1
  Top 0.813: RX3.1 63.44,64.41 R11.1
  Top 1.016: 74.15,71.5 74.15,73.5 | D4.K1 72.1,70.11 72.1,67.02 69.49,64.41 RX3.1
  Top 2.54: D4.K1 76.85,72.38
CHARGING  (via drill 0.3)
  Top 0.203: U6.3 63.52,140.69 64.5,140.69 65.6,141.78 v65.6,142.75 | 106.25,146.01 v106.24,146 109.33,146 111.61,148.28 UPPER1.PIN9 | v82.87,149.86 82.87,151.84 R5.2
  Top 0.254: 111.65,149.12 UPPER1.PIN9
  Bottom 0.203: v65.6,142.75 69.41,146.57 74.61,146.57 78.53,150.49 82.87,150.49 | v106.24,146 104.13,148.11 90.48,148.11 88.1,150.49 82.87,150.49 | 82.87,150.49 v82.87,149.86
CHARGING1  (via drill 0.3)
  Top 0.203: U4.3 63.52,60.69 64.5,60.69 65.6,61.78 v65.6,62.75 | 106.25,66.02 v106.24,66 109.33,66 111.61,68.28 UPPER2.PIN9 | v82.87,69.86 82.87,71.84 R15.2
  Top 0.254: 111.65,69.12 UPPER2.PIN9
  Bottom 0.203: v65.6,62.75 69.41,66.57 74.61,66.57 78.53,70.49 82.87,70.49 | v106.24,66 104.13,68.11 90.48,68.11 88.1,70.49 82.87,70.49 | 82.87,70.49 v82.87,69.86
EEPROM_PROT  (via drill 0.3, 0.35)
  Top 0.152: v71.45,119.68 v71.45,114.5
  Top 0.254: BACKPLANE.P1 71.44,114.48 v71.45,114.5
  Bottom 0.203: LOWER1.PIN2 47.21,103.84 48.73,105.47 58.23,105.47 67.72,114.96 71.15,114.96 v71.45,114.5 | v71.45,119.68 71.58,119.55 82.83,119.55 85.23,121.95 105.14,121.95 106.03,121.06 106.03,116.69 107,115.73 114.72,115.73 115.4,116.41 115.4,117.89 115.4,118.75 114.47,119.69 BACKPACK.5
  other vias: 46.47,103.84
EEPROM_PROT1  (via drill 0.3, 0.35)
  Top 0.152: v71.45,39.68 v71.45,34.5
  Top 0.254: BACKPLANE1.P1 71.44,34.48 v71.45,34.5
  Bottom 0.203: LOWER2.PIN2 47.21,23.84 48.73,25.47 58.23,25.47 67.72,34.96 71.15,34.96 v71.45,34.5 | v71.45,39.68 71.58,39.55 82.83,39.55 85.23,41.95 105.14,41.95 106.03,41.06 106.03,36.69 107,35.73 114.72,35.73 115.4,36.41 115.4,37.89 115.4,38.76 114.47,39.69 BACKPACK1.5
  other vias: 46.47,23.84
GND  (via drill 0.3, 0.35)  (2 unrouted)
  Top 0.152: BTN-JST.+ v95.95,162.1
  Top 0.203: FFC2.4 FFC1.4 29.41,120.64 v28.65,121.4 | FFC2.3 FFC1.3 28.91,121.14 v28.65,121.4 | FFC2.2 FFC1.2 28.89,121.64 v28.65,121.4 | FFC2.1 FFC1.1 29.39,122.14 v28.65,121.4 | U$1.P$19 v42.95,145.13 | C2.- 34.52,130.17 v34.45,130.1 | C4.2 33.75,131.94 v33.75,133 | C5.2 35.88,128.67 v35.85,128.7 | U$2.2 v37.76,135.69 v37.75,135.7 | U1.28 30.64,136.99 v30.65,137 | C1.- 30.32,130.43 | 30.32,130.43 v30.35,130.4 | C6.2 28.94,130.43 30.32,130.43 | C3.2 v30.34,129.11 v30.35,129.1 | U$3.2 v21.96,130.51 v21.95,130.5 | U1.12 v21.14,146.01 v21.15,146 | U1.9 39.8,150.07 40.99,151.26 v40.99,151.66 | U$1.P$12 v53.45,144.9 | U$1.P$8 v51.95,131.52 | U$1.P$3 v44.45,131.49 | R4.1 41.4,125.15 v41.45,125.1 | U2.6 59.13,149.43 58.69,149.86 58.69,150.48 58.89,150.68
  Top 0.406: U6.6 59.02,140.49 | v80.75,162.3 80.78,162.27 SOLAR-JST.- 81.8,157.48 v82.13,157.48
  Top 0.508: BACKPLANE.P20 71.44,111.61 v72.05,111 72.7,111.66 BACKPLANE.P19
  GND 0.254: 32.38,126.23 32.15,126 32.15,124.5 | v41.45,125.1 41.15,125.4 41.15,125.5
  GND 0.406: 44.15,148.5 42.95,147.3 v42.95,145.13 | v34.45,130.1 34.15,130.4 34.15,130.5 | v33.75,133 33.75,132.9 34.15,132.5 | v35.85,128.7 35.95,128.7 36.15,128.5 | v37.75,135.7 37.95,135.7 38.15,135.5 | v30.65,137 30.15,137.5 | v30.35,130.4 30.25,130.4 30.15,130.5 | v30.35,129.1 30.15,129.3 30.15,129.5 | v21.95,130.5 22.15,130.5 | v21.15,146 21.15,145.5 | v40.99,151.66 41.15,151.5 | v53.45,144.9 53.45,144.8 | v80.75,162.3 80.95,162.5 81.15,162.5 | v82.13,157.48 82.15,157.5 | v51.95,131.52 52.15,131.32 | v44.45,131.49 44.45,128.8 44.15,128.5
  GND 0.508: v72.05,111 72.05,110.6 72.15,110.5
  Bottom 0.203: BACKPACK.2 v116.54,127.31 v116.55,127.3
  other vias: 75,137 73,137 71,137 71,135 71,133 71,131 73,131 75,131 71,129 69,129 69,131 67,131 67,129 65,129 65,135 65,137 69,139 71,139 73,139 75,139 73,141 71,141 69,141 69,143 71,143 73,143 73,145 75,145 75,143 63,129 61,129 59,129 57,129 57,131 61,135 63,135 61,139 61,141 61,143 61,145 53,113 53,111 55,113 57,113 59,113 57,111 55,111 47,111 47,113 45,115 45,113 45,111 43,111 43,113 43,115 26.6,142.7 26.6,140.7 24.6,140.7 24.6,142.7 91,157 93,157 53.08,151.1 57.55,156.58 57.55,157.8 56.53,157.8 81.05,137 81.05,135 81.05,133 81.05,129 81.05,127 83,137 83,135 83,133 83,127 85,127 85,129 85,131 85,133 85,135 85,137
  pour GND: 17.15,99.5 17.15,147.5 19.15,149.5 38.15,149.5 40.15,151.5 40.15,163.5 42.15,165.5 93.15,165.5 103.15,155.5 120.15,155.5 122.15,153.5 122.15,109.5 120.15,107.5 63.15,107.5 52.15,96.5 20.15,96.5
  pour Bottom: 15,169 125,169 125,95 15,95
  pour Top: 15,95 15,169 125,169 125,95
  cutout Top: 29.83,120.6 29.83,122.64 30.85,122.64 30.85,120.6
  cutout Top: 39.99,122.43 39.99,120.4 40.81,120.4 40.81,122.43
  cutout Bottom: 13,159 13,149 31,149 33,151 35,151 arc90 37.3,153.3 37.3,161 13,161 13,157
GND1
  cutout Top: 13,159 13,149 31,149 33,151 35,151 arc90 37.3,153.3 37.3,161 13,161 13,157
GND2  (via drill 0.3, 0.35)  (2 unrouted)
  Top 0.152: BTN-JST1.+ v95.95,82.1
  Top 0.203: FFC4.4 FFC3.4 29.41,40.65 v28.65,41.4 | FFC4.3 FFC3.3 28.91,41.15 v28.65,41.4 | FFC4.2 FFC3.2 28.89,41.65 v28.65,41.4 | FFC4.1 FFC3.1 29.39,42.15 v28.65,41.4 | U$6.P$19 v42.95,65.13 | C15.- 34.52,50.17 v34.45,50.1 | C17.2 33.75,51.94 v33.75,53 | C19.2 35.88,48.67 v35.85,48.7 | U$7.2 v37.76,55.69 v37.75,55.7 | U3.28 30.64,56.99 v30.65,57 | C14.- 30.32,50.43 | 30.32,50.43 v30.35,50.4 | C18.2 28.94,50.43 30.32,50.43 | C16.2 v30.34,49.11 v30.35,49.1 | U$8.2 v21.96,50.51 v21.95,50.5 | U3.12 v21.14,66.01 v21.15,66 | U3.9 39.8,70.07 40.99,71.26 v40.99,71.66 | U$6.P$12 v53.45,64.9 | U$6.P$8 v51.95,51.52 | U$6.P$3 v44.45,51.49 | R14.1 41.4,45.15 v41.45,45.1 | U5.6 59.13,69.43 58.69,69.86 58.69,70.48 58.89,70.68
  Top 0.406: U4.6 59.02,60.49 | v80.75,82.3 80.78,82.27 SOLAR-JST1.- 81.8,77.48 v82.13,77.48
  Top 0.508: BACKPLANE1.P20 71.44,31.61 v72.05,31 72.7,31.66 BACKPLANE1.P19
  GND 0.254: 32.38,46.23 32.15,45.99 32.15,44.5 | v41.45,45.1 41.15,45.4 41.15,45.5
  GND 0.406: 44.15,68.5 42.95,67.3 v42.95,65.13 | v34.45,50.1 34.15,50.4 34.15,50.5 | v33.75,53 33.75,52.9 34.15,52.5 | v35.85,48.7 35.95,48.7 36.15,48.5 | v37.75,55.7 37.95,55.7 38.15,55.5 | v30.65,57 30.15,57.5 | v30.35,50.4 30.25,50.4 30.15,50.5 | v30.35,49.1 30.15,49.3 30.15,49.5 | v21.95,50.5 22.15,50.5 | v21.15,66 21.15,65.5 | v40.99,71.66 41.15,71.5 | v53.45,64.9 53.45,64.8 | v80.75,82.3 80.95,82.5 81.15,82.5 | v82.13,77.48 82.15,77.5 | v51.95,51.52 52.15,51.32 | v44.45,51.49 44.45,48.8 44.15,48.5
  GND 0.508: v72.05,31 72.05,30.6 72.15,30.5
  Bottom 0.203: BACKPACK1.2 v116.54,47.31 v116.55,47.3
  other vias: 75,57 73,57 71,57 71,55 71,53 71,51 73,51 75,51 71,49 69,49 69,51 67,51 67,49 65,49 65,55 65,57 69,59 71,59 73,59 75,59 73,61 71,61 69,61 69,63 71,63 73,63 73,65 75,65 75,63 63,49 61,49 59,49 57,49 57,51 61,55 63,55 61,59 61,61 61,63 61,65 53,33 53,31 55,33 57,33 59,33 57,31 55,31 47,31 47,33 45,35 45,33 45,31 43,31 43,33 43,35 26.6,62.7 26.6,60.7 24.6,60.7 24.6,62.7 91,77 93,77 53.08,71.1 57.55,76.58 57.55,77.8 56.53,77.8 81.05,57 81.05,55 81.05,53 81.05,49 81.05,47 83,57 83,55 83,53 83,47 85,47 85,49 85,51 85,53 85,55 85,57
  pour GND: 17.15,19.5 17.15,67.5 19.15,69.5 38.15,69.5 40.15,71.5 40.15,83.5 42.15,85.5 93.15,85.5 103.15,75.5 120.15,75.5 122.15,73.5 122.15,29.5 120.15,27.5 63.15,27.5 52.15,16.5 20.15,16.5
  pour Bottom: 15,89 125,89 125,15 15,15
  pour Top: 15,15 15,89 125,89 125,15
  cutout Top: 29.83,40.6 29.83,42.64 30.85,42.64 30.85,40.6
  cutout Top: 39.99,42.43 39.99,40.4 40.81,40.4 40.81,42.43
  cutout Bottom: 13,79 13,69 31,69 33,71 35,71 arc90 37.3,73.3 37.3,81 13,81 13,77
GND3
  cutout Top: 13,79 13,69 31,69 33,71 35,71 arc90 37.3,73.3 37.3,81 13,81 13,77
GPS_ENABLE
  Top 0.203: LOWER1.PIN16 38.69,98.94 38.69,98.04 40.53,96.2 50.16,96.2 51.15,97.19 51.15,113.06 37.47,126.75 | 37.47,126.75 37.15,126.75 36,126.75 32.15,130.6 32.15,132.5 34.15,134.5 36.56,134.5 U$2.3 | 37.47,126.75 39.65,126.75 R4.2
GPS_ENABLE1
  Top 0.203: LOWER2.PIN16 38.69,18.94 38.69,18.04 40.53,16.2 50.16,16.2 51.15,17.19 51.15,33.06 37.47,46.75 | 37.47,46.75 37.15,46.75 36,46.75 32.15,50.6 32.15,52.5 34.15,54.5 36.56,54.5 U$7.3 | 37.47,46.75 39.65,46.75 R14.2
GPS_RX
  Top 0.203: U$1.P$9 53.45,129.28 54.81,127.92 62.14,127.92 67.95,122.11 77.13,122.11 80.33,125.32 88.17,125.32 102.28,139.43 102.28,147.52 101.45,148.35 UPPER1.PIN5
GPS_RX1
  Top 0.203: U$6.P$9 53.45,49.28 54.81,47.92 62.14,47.92 67.95,42.11 77.13,42.11 80.33,45.32 88.17,45.32 102.28,59.43 102.28,67.52 101.45,68.35 UPPER2.PIN5
GPS_TX
  Top 0.203: U$1.P$10 54.95,129.4 56.03,128.32 62.31,128.32 68.12,122.52 76.96,122.52 80.17,125.72 88,125.72 101.88,139.6 101.88,146.24 100.56,147.56 100.56,151.91 101.56,152.91 101.56,153.79 UPPER1.PIN16
GPS_TX1
  Top 0.203: U$6.P$10 54.95,49.4 56.03,48.33 62.31,48.33 68.12,42.52 76.96,42.52 80.17,45.72 88,45.72 101.88,59.6 101.88,66.24 100.56,67.56 100.56,71.91 101.56,72.91 101.56,73.79 UPPER2.PIN16
HOTSWAP_INT  (via drill 0.35)
  Top 0.254: BACKPLANE.P3 73.97,114.47 v73.95,114.5
  Bottom 0.203: v73.95,114.5 72.65,115.78 67.37,115.78 57.88,106.28 44.67,106.28 43.85,105.46 43.85,103.58 LOWER1.PIN3
  other vias: 43.93,103.5
HOTSWAP_INT1  (via drill 0.35)
  Top 0.254: BACKPLANE1.P3 73.97,34.48 v73.95,34.5
  Bottom 0.203: v73.95,34.5 72.65,35.78 67.37,35.78 57.88,26.28 44.67,26.28 43.85,25.46 43.85,23.58 LOWER2.PIN3
  other vias: 43.93,23.5
MOD_G0
  Top 0.203: FFC1.13 FFC2.13 46.3,116.14 49.89,112.55 49.89,105.51 49.01,104.63 LOWER1.PIN1
MOD_G1
  Top 0.203: FFC3.13 FFC4.13 46.3,36.14 49.89,32.55 49.89,25.51 49.01,24.63 LOWER2.PIN1
MOD_G2  (via drill 0.3, 0.35)
  Top 0.152: v72.65,120.18 v72.65,114.6
  Top 0.254: BACKPLANE.P2 72.65,113.53 v72.65,114.6
  Bottom 0.203: 43.93,102.23 LOWER1.PIN18 43.93,102.54 44.64,103.25 44.64,105.64 44.88,105.87 58.05,105.87 67.55,115.37 71.95,115.37 v72.65,114.6 | v72.65,120.18 72.85,119.98 82.65,119.98 85.03,122.36 105.32,122.36 106.44,121.24 106.44,116.87 107.17,116.13 111.72,116.13 112.74,117.15 BACKPACK.6
  other vias: 43.93,99.1
MOD_G3  (via drill 0.3, 0.35)
  Top 0.152: v72.65,40.18 v72.65,34.6
  Top 0.254: BACKPLANE1.P2 72.65,33.52 v72.65,34.6
  Bottom 0.203: 43.93,22.23 LOWER2.PIN18 43.93,22.54 44.64,23.25 44.64,25.64 44.88,25.87 58.05,25.87 67.55,35.37 71.95,35.37 v72.65,34.6 | v72.65,40.18 72.85,39.98 82.65,39.98 85.03,42.36 105.32,42.36 106.44,41.24 106.44,36.87 107.17,36.13 111.72,36.13 112.74,37.15 BACKPACK1.6
  other vias: 43.93,19.1
MOD_G4  (via drill 0.35)
  Top 0.254: BACKPLANE1.P5 76.45,33.53 v76.45,34.5
  Bottom 0.203: v76.45,34.5 74.34,36.59 67.01,36.59 57.52,27.09 44.33,27.09 41.39,24.16 LOWER2.PIN4
  other vias: 41.39,23.5
MOD_G5  (via drill 0.35)
  Top 0.254: BACKPLANE.P5 76.45,113.53 v76.45,114.5
  Bottom 0.203: v76.45,114.5 74.34,116.59 67.01,116.59 57.52,107.09 44.33,107.09 41.39,104.16 LOWER1.PIN4
  other vias: 41.39,103.5
MOD_G6
  Top 0.203: FFC3.14 FFC4.14 46.22,35.64 49.47,32.4 49.47,26.3 48.93,25.77 45.68,25.77 45.28,25.36 45.28,20.82 46.47,19.63 LOWER2.PIN19
MOD_G7
  Top 0.203: FFC3.12 FFC4.12 46.4,36.64 50.3,32.74 50.3,20.9 49.01,19.61 LOWER2.PIN20
MOD_G13
  Top 0.203: FFC1.14 FFC2.14 46.22,115.64 49.47,112.4 49.47,106.3 48.93,105.77 45.68,105.77 45.28,105.36 45.28,100.82 46.47,99.63 LOWER1.PIN19
MOD_G14
  Top 0.203: FFC1.12 FFC2.12 46.4,116.64 50.3,112.74 50.3,100.9 49.01,99.61 LOWER1.PIN20
MOD_MISO  (via drill 0.3, 0.35)
  Top 0.152: v82.72,122.15 82.86,122.01
  Top 0.254: BACKPLANE.P10 82.86,114.48 | 82.86,114.48 v82.85,114.5 | 82.86,122.01 82.86,114.48
  Bottom 0.203: LOWER1.PIN10 28.22,105.91 40.26,105.91 43.48,109.13 56.65,109.13 66.17,118.62 78.7,118.62 v82.85,114.5 | BACKPACK.10 107.76,124.77 106.59,123.6 84.45,123.6 83,122.15 v82.72,122.15
  other vias: 26.15,103.84
MOD_MISO1  (via drill 0.3, 0.35)
  Top 0.152: v82.72,42.15 82.86,42.01
  Top 0.254: BACKPLANE1.P10 82.86,34.48 | 82.86,34.48 v82.85,34.5 | 82.86,42.01 82.86,34.48
  Bottom 0.203: LOWER2.PIN10 28.22,25.91 40.26,25.91 43.48,29.13 56.65,29.13 66.17,38.62 78.7,38.62 v82.85,34.5 | BACKPACK1.10 107.76,44.77 106.59,43.6 84.45,43.6 83,42.15 v82.72,42.15
  other vias: 26.15,23.84
MOD_MOSI  (via drill 0.3, 0.35)
  Top 0.152: v80.35,123 80.33,122.97
  Top 0.254: BACKPLANE.P8 80.33,114.58 | 80.33,114.58 v80.35,114.6 | 80.33,122.97 80.33,114.58
  Bottom 0.203: v80.35,114.6 77.12,117.81 66.51,117.81 56.99,108.31 43.81,108.31 40.59,105.09 31.3,105.09 28.69,102.48 LOWER1.PIN12 | BACKPACK.11 107.79,127.31 106.85,126.37 106.85,124.44 106.44,124.03 84.3,124.03 83.27,123 v80.35,123
  other vias: 28.69,98.76
MOD_MOSI1  (via drill 0.3, 0.35)
  Top 0.152: v80.35,43 80.33,42.98
  Top 0.254: BACKPLANE1.P8 80.33,34.58 | 80.33,34.58 v80.35,34.6 | 80.33,42.98 80.33,34.58
  Bottom 0.203: v80.35,34.6 77.12,37.81 66.51,37.81 56.99,28.31 43.81,28.31 40.59,25.09 31.3,25.09 28.69,22.48 LOWER2.PIN12 | BACKPACK1.11 107.79,47.31 106.85,46.37 106.85,44.44 106.44,44.03 84.3,44.03 83.27,43 v80.35,43
  other vias: 28.69,18.76
MOD_SCK  (via drill 0.3, 0.35)
  Top 0.254: BACKPLANE.P9 81.59,114.45 v81.55,114.5 v81.55,124.2
  Bottom 0.203: LOWER1.PIN9 30.35,105.5 40.43,105.5 43.65,108.72 56.82,108.72 66.34,118.22 77.81,118.22 v81.55,114.5 | v81.55,124.2 83.89,124.2 84.13,124.44 106.27,124.44 106.42,124.59 106.42,128.48 107.79,129.85 BACKPACK.12
  other vias: 28.69,103.84
MOD_SCK1  (via drill 0.3, 0.35)
  Top 0.254: BACKPLANE1.P9 81.59,34.45 v81.55,34.5 v81.55,44.2
  Bottom 0.203: LOWER2.PIN9 30.35,25.5 40.43,25.5 43.65,28.72 56.82,28.72 66.34,38.22 77.81,38.22 v81.55,34.5 | v81.55,44.2 83.89,44.2 84.13,44.44 106.27,44.44 106.42,44.59 106.42,48.48 107.79,49.85 BACKPACK1.12
  other vias: 28.69,23.84
MOD_SCL  (via drill 0.3, 0.35)  (1 unrouted)
  Top 0.152: v77.75,120.9 77.75,120.6 77.78,120.56
  Top 0.203: U2.4 56.58,148.16 v57.27,148.85 | R9.1 108.87,119.6 v108.88,119.59
  Top 0.254: BACKPLANE.P6 77.78,114.47 | 77.78,114.47 v77.75,114.5 | 77.78,120.56 77.78,114.47
  Bottom 0.203: v77.75,114.5 75.23,117 66.84,117 57.33,107.5 44.15,107.5 40.93,104.28 33.29,104.28 | v77.75,120.9 78.24,120.41 82.47,120.41 84.83,122.76 105.5,122.76 106.85,121.42 106.85,120.6 107.76,119.69 BACKPACK.8 | 33.29,104.28 33.26,104.28 | 33.29,104.28 31.23,102.22 LOWER1.PIN13 | BACKPACK.8 108.57,119.69 | v57.27,148.85 57.27,149.67 57.06,149.87 57.06,150.48 57.89,151.3 88.47,151.3 90.84,148.94 107.37,148.94 110.99,145.31 112.79,145.31 119.36,138.74 119.36,124.83 115.46,120.94 110.83,120.94 109.69,119.79 108.75,119.79 BACKPACK.8
  other vias: 31.23,99.1
MOD_SCL1  (via drill 0.3, 0.35)  (1 unrouted)
  Top 0.152: v77.75,40.9 77.75,40.6 77.78,40.56
  Top 0.203: U5.4 56.58,68.16 v57.27,68.85 | R19.1 108.87,39.6 v108.88,39.59
  Top 0.254: BACKPLANE1.P6 77.78,34.47 | 77.78,34.47 v77.75,34.5 | 77.78,40.56 77.78,34.47
  Bottom 0.203: v77.75,34.5 75.23,37 66.84,37 57.33,27.5 44.15,27.5 40.93,24.28 33.29,24.28 | v77.75,40.9 78.24,40.41 82.47,40.41 84.83,42.76 105.5,42.76 106.85,41.42 106.85,40.6 107.76,39.69 BACKPACK1.8 | 33.29,24.28 33.26,24.28 | 33.29,24.28 31.23,22.22 LOWER2.PIN13 | BACKPACK1.8 108.57,39.69 | v57.27,68.85 57.27,69.67 57.06,69.87 57.06,70.48 57.89,71.3 88.47,71.3 90.84,68.94 107.37,68.94 110.99,65.31 112.79,65.31 119.36,58.74 119.36,44.83 115.46,40.94 110.83,40.94 109.69,39.79 108.75,39.79 BACKPACK1.8
  other vias: 31.23,19.1
MOD_SDA  (via drill 0.3, 0.35)  (1 unrouted)
  Top 0.152: v79.05,121.37 v79.06,121.36 | U2.3 56.98,149.43 v57.67,150.12
  Top 0.203: R10.1 107.68,122.23 v108.88,122.23
  Top 0.254: BACKPLANE.P7 v79.06,114.5 | v79.06,114.5 v79.05,114.5 | v79.06,121.36 v79.06,114.5
  Bottom 0.203: v79.05,114.5 76.12,117.4 66.68,117.4 57.16,107.91 43.98,107.91 40.76,104.69 32.42,104.69 LOWER1.PIN8 | v79.05,121.37 79.59,120.83 82.28,120.83 84.62,123.17 106.64,123.17 107.58,122.23 BACKPACK.9 110.1,122.23 110.98,121.34 115.3,121.34 118.96,125 118.96,138.57 112.62,144.91 110.8,144.91 107.19,148.52 90.65,148.52 88.27,150.89 58.45,150.89 v57.67,150.12
  other vias: 31.23,103.5
MOD_SDA1  (via drill 0.3, 0.35)  (1 unrouted)
  Top 0.152: v79.05,41.37 v79.06,41.36 | U5.3 56.98,69.43 v57.67,70.12
  Top 0.203: R20.1 107.68,42.23 v108.88,42.23
  Top 0.254: BACKPLANE1.P7 v79.06,34.5 | v79.06,34.5 v79.05,34.5 | v79.06,41.36 v79.06,34.5
  Bottom 0.203: v79.05,34.5 76.12,37.4 66.68,37.4 57.16,27.91 43.98,27.91 40.76,24.69 32.42,24.69 LOWER2.PIN8 | v79.05,41.37 79.59,40.83 82.28,40.83 84.62,43.17 106.64,43.17 107.58,42.23 BACKPACK1.9 110.1,42.23 110.98,41.34 115.3,41.34 118.96,45 118.96,58.57 112.62,64.91 110.8,64.91 107.19,68.52 90.65,68.52 88.27,70.89 58.45,70.89 v57.67,70.12
  other vias: 31.23,23.5
N$1
  Top 0.203: C3.1 26.07,129.11 U$3.4
N$2
  Top 0.203: U$2.4 35.46,131.9 C4.1
N$3
  Top 0.203: U$1.P$1 41.3,130.17 C2.+ | C2.+ C5.1 | U$2.5 38.71,130.2 C2.+
N$4
  Top 0.254: U$11.ANT 53.6,148.26 53.6,147.68 U$1.P$11
N$5
  Top 0.203: R2.2 U6.4
N$6
  Top 0.203: U$4.4 88.37,148.19 C8.1
N$7
  Top 0.203: U$2.1 38.76,134.3 FB1.2
N$8
  Top 0.203: U$5.2 45.14,162.56 46.66,164.08 63.26,164.08 84.09,164.08 85.31,162.87 85.31,158.19 81.45,154.33 81.45,149.86 83.28,148.03 85.94,148.03 86.15,148.24 | U$4.3 86.15,149.63 86.15,148.24 | 86.15,148.24 R1.2
N$9  (via drill 5.3 pad 8)
  other vias: 60.15,123.5
N$11
  Top 0.203: C16.1 26.07,49.11 U$8.4
N$12
  Top 0.203: U$7.4 35.46,51.9 C17.1
N$13
  Top 0.203: U$6.P$1 41.3,50.17 C15.+ | C15.+ C19.1 | U$7.5 38.71,50.2 C15.+
N$14  (1 unrouted)
  Top 0.61: 63.76,138.94 63.52,139.18 63.37,139.18 63.37,138.82 63.76,138.43 63.12,137.8 Q2.1 Q2.2 Q2.3
  Top 0.813: RX1.2 64.9,138.81 64.53,138.43 63.76,138.43
N$16  (1 unrouted)
  Top 0.61: 63.76,58.94 63.52,59.18 63.37,59.18 63.37,58.82 63.76,58.43 63.12,57.8 Q1.1 Q1.2 Q1.3
  Top 0.813: RX3.2 64.9,58.81 64.53,58.43 63.76,58.43
N$17
  Top 0.305: Q2.4 59.31,138.56 59.07,138.8 U6.8
N$18
  Top 0.203: C11.1 U6.5
N$19
  Top 0.305: Q1.4 59.31,58.56 59.07,58.8 U4.8
N$20
  Top 0.203: C20.1 U4.5
N$21
  Top 0.203: R11.2 U4.4
N$22
  Top 0.203: U$9.4 88.37,68.19 C23.1
N$23
  Top 0.203: U$10.2 45.14,82.56 46.66,84.08 63.26,84.08 84.09,84.08 85.31,82.87 85.31,78.19 81.45,74.33 81.45,69.86 83.28,68.03 85.94,68.03 86.15,68.24 | U$9.3 86.15,69.63 86.15,68.24 | 86.15,68.24 R12.2
N$24
  Top 0.254: U$12.ANT 53.6,68.26 53.6,67.68 U$6.P$11
N$25
  Top 0.203: U$7.1 38.76,54.3 FB2.2
N$26  (via drill 5.3 pad 8)
  other vias: 60.15,43.5
RAD_SCL
  Top 0.203: LOWER1.PIN14 33.77,100.33 34.68,101.25 34.68,107.9 | 34.68,107.9 34.68,108.97 30.13,113.52 FFC1.16 FFC2.16 | R6.1 35.7,107.9 34.68,107.9
RAD_SCL1
  Top 0.203: LOWER2.PIN14 33.77,20.34 34.68,21.25 34.68,27.9 | 34.68,27.9 34.68,28.97 30.13,33.52 FFC3.16 FFC4.16 | R16.1 35.7,27.9 34.68,27.9
RAD_SDA
  Top 0.203: LOWER1.PIN7 34.27,104 34.27,107.9 | FFC2.15 FFC1.15 29.5,115.14 29.15,114.8 29.15,113.91 34.28,108.78 34.28,107.9 34.27,107.9 | R7.1 34.27,107.9
RAD_SDA1
  Top 0.203: LOWER2.PIN7 34.27,24 34.27,27.9 | FFC4.15 FFC3.15 29.5,35.14 29.15,34.8 29.15,33.91 34.28,28.78 34.28,27.9 34.27,27.9 | R17.1 34.27,27.9
RADIO_MISO  (via drill 0.35, 0.4)  (1 unrouted)
  Top 0.203: U1.17 20.8,140.93 v21.16,141.29 21.16,142.92 21.91,143.67 35.13,143.67 45.44,153.98 51.4,153.98 52.17,153.22 v53.8,153.22 | FFC2.9 FFC1.9 30.1,118.12 28.87,118.12 21.15,125.83 v21.15,132.5
  Bottom 0.203: v53.8,153.22 54.07,153.47 103.43,153.47 103.83,153.1 106.52,153.1 v106.53,153.11 | v21.15,132.5 v21.15,141.28
  Bottom 0.254: v21.15,141.28 v21.16,141.29
RADIO_MISO1  (via drill 0.35, 0.4)  (1 unrouted)
  Top 0.203: U3.17 20.8,60.93 v21.16,61.29 21.16,62.92 21.91,63.67 35.13,63.67 45.44,73.98 51.4,73.98 52.17,73.22 v53.8,73.22 | FFC4.9 FFC3.9 30.1,38.12 28.87,38.12 21.15,45.84 v21.15,52.5
  Bottom 0.203: v53.8,73.22 54.07,73.47 103.43,73.47 103.83,73.1 106.52,73.1 v106.53,73.11 | v21.15,52.5 v21.15,61.28
  Bottom 0.254: v21.15,61.28 v21.16,61.29
RADIO_MOSI  (via drill 0.35, 0.4)  (1 unrouted)
  Top 0.203: U1.15 20.1,142.96 v21.2,144.06 21.26,144.12 35,144.12 45.28,154.4 v51.95,154.4 | FFC1.10 FFC2.10 42.3,117.64 v43.15,118.5
  Bottom 0.203: v103.99,153.93 52.45,153.93 v51.95,154.4 | v43.15,118.5 43.15,137.5 34.15,146.5 23.64,146.5 v21.2,144.06
RADIO_MOSI1  (via drill 0.35, 0.4)  (1 unrouted)
  Top 0.203: U3.15 20.1,62.96 v21.2,64.06 21.26,64.12 35,64.12 45.28,74.4 v51.95,74.4 | FFC3.10 FFC4.10 42.3,37.65 v43.15,38.5
  Bottom 0.203: v103.99,73.93 52.45,73.93 v51.95,74.4 | v43.15,38.5 43.15,57.5 34.15,66.5 23.64,66.5 v21.2,64.06
RADIO_SCK  (via drill 0.35, 0.4)  (1 unrouted)
  Top 0.203: U1.18 v22.15,139.91 22.63,139.91 23.34,139.2 27.51,139.2 31.57,143.26 35.3,143.26 45.6,153.57 50.32,153.57 v51.36,152.53 | FFC2.11 FFC1.11 24.5,117.14 v23.15,118.5
  Bottom 0.203: v103.99,150.87 101.84,153.01 54.74,153.01 54.25,152.53 v51.36,152.53 | v23.15,118.5 23.15,138.91 v22.15,139.91
RADIO_SCK1  (via drill 0.35, 0.4)  (1 unrouted)
  Top 0.203: U3.18 v22.15,59.91 22.63,59.91 23.34,59.2 27.51,59.2 31.57,63.26 35.3,63.26 45.6,73.57 50.32,73.57 v51.36,72.53 | FFC4.11 FFC3.11 24.5,37.15 v23.15,38.5
  Bottom 0.203: v103.99,70.87 101.84,73.01 54.74,73.01 54.25,72.53 v51.36,72.53 | v23.15,38.5 23.15,58.91 v22.15,59.91
SOL+
  Top 0.254: C10.1 80.06,130.15 80,130.22
  Top 1.016: SOLAR-JST.+ 78.78,155.66 80,154.44 80,147.1 | 80,147.1 79.97,147.07 | 80,147.1 80,130.22 | 80,130.22 80,127.07 79.34,126.42 REG1.P$1 REG1.P$10 | 80,130.22 78.74,128.96 REG1.P$2 77.63,128.91 J1.P$2
SOL+1
  Top 0.254: C25.1 80.06,50.15 80,50.22
  Top 1.016: SOLAR-JST1.+ 78.78,75.66 80,74.44 80,67.1 | 80,67.1 79.97,67.07 | 80,67.1 80,50.22 | 80,50.22 80,47.07 79.34,46.42 REG2.P$1 REG2.P$10 | 80,50.22 78.74,48.96 REG2.P$2 77.63,48.91 J2.P$2
SOLREG
  Top 0.254: C13.1 77.44,141 77.52,140.92
  Top 1.016: D3.A2-1 76.25,147.95 76.9,147.3 77.52,147.92 D3.A2-2 77.52,140.92 77.52,136.74 REG1.P$5 REG1.P$4 74.88,134.04 J1.P$1
SOLREG1
  Top 0.254: C26.1 77.44,61 77.52,60.92
  Top 1.016: D4.A2-1 76.25,67.95 76.9,67.3 77.52,67.92 D4.A2-2 77.52,60.92 77.52,56.74 REG2.P$5 REG2.P$4 74.88,54.04 J2.P$1
UNREG  (via drill 0.3, 0.35, 0.65)  (1 unrouted)
  Top 0.203: FFC1.8 FFC2.8 | FFC2.7 FFC1.7 | FFC1.6 FFC2.6 | FFC2.5 FFC1.5 | v42.15,161.6 U$5.C
  Top 0.305: FFC1.5 29.17,120.14 28.67,119.64 FFC1.6 | FFC1.8 29.15,118.64 28.41,119.38 | FFC1.7 28.66,119.14
  Top 0.406: 28.41,119.38 28.41,119.39 | 28.67,119.64 28.41,119.39 | 28.66,119.14 28.41,119.39
  Top 0.508: BACKPLANE.P14 79.06,111.59 v79.65,111 80.33,111.67 BACKPLANE.P13
  Top 0.61: U$4.1 84.86,151.65 83.68,150.47 v83.68,149.05 | FB1.1 36.9,139.14 v36.54,139.5 | U$3.1 22.43,131.46 v22.11,131.78
  Top 1.27: D1.K1 D1.K2
  Top 2.032: D1.K1 v67.43,156.56 v67.43,156.57 | D1.K2 69.92,156.51 v69.86,156.57
  PWR 0.152: v83.68,149.05 83.68,148.24
  PWR 0.508: v79.65,111 80.15,111.5
  Bottom 0.203: BACKPACK.1 113.65,130.9 v114.35,131.6
  other vias: 28.61,119.38
  pour PWR: 17.15,99.5 17.15,147.5 19.15,149.5 38.15,149.5 40.15,151.5 40.15,163.5 42.15,165.5 58.15,165.5 65.15,165.5 93.15,165.5 103.15,155.5 120.15,155.5 122.15,153.5 122.15,109.5 120.15,107.5 63.15,107.5 52.15,96.5 20.15,96.5
UNREG1  (via drill 0.3, 0.35, 0.65)  (1 unrouted)
  Top 0.203: FFC3.8 FFC4.8 | FFC4.7 FFC3.7 | FFC3.6 FFC4.6 | FFC4.5 FFC3.5 | v42.15,81.6 U$10.C
  Top 0.305: FFC3.5 29.17,40.15 28.67,39.65 FFC3.6 | FFC3.8 29.15,38.65 28.41,39.38 | FFC3.7 28.66,39.15
  Top 0.406: 28.41,39.38 28.41,39.39 | 28.67,39.65 28.41,39.39 | 28.66,39.15 28.41,39.39
  Top 0.508: BACKPLANE1.P14 79.06,31.59 v79.65,31 80.33,31.68 BACKPLANE1.P13
  Top 0.61: U$9.1 84.86,71.65 83.68,70.47 v83.68,69.05 | FB2.1 36.9,59.14 v36.54,59.5 | U$8.1 22.43,51.46 v22.11,51.78
  Top 1.27: D2.K1 D2.K2
  Top 2.032: D2.K1 v67.43,76.56 v67.43,76.57 | D2.K2 69.92,76.51 v69.86,76.57
  PWR 0.152: v83.68,69.05 83.68,68.24
  PWR 0.508: v79.65,31 80.15,31.5
  Bottom 0.203: BACKPACK1.1 113.65,50.9 v114.35,51.6
  other vias: 28.61,39.38
  pour PWR: 17.15,19.5 17.15,67.5 19.15,69.5 38.15,69.5 40.15,71.5 40.15,83.5 42.15,85.5 58.15,85.5 65.15,85.5 93.15,85.5 103.15,75.5 120.15,75.5 122.15,73.5 122.15,29.5 120.15,27.5 63.15,27.5 52.15,16.5 20.15,16.5
V1  (via drill 0.35)  (1 unrouted)
  Top 0.61: D2.A2-1 69.95,68.09 69.95,67.27 | D2.A2-2 69.95,68.1 v69.95,67.2 | D4.A1-2 74.35,68.1 | 74.35,68.1 v74.35,67.2 | D4.A1-1 73.72,68.73 74.35,68.1
  Bottom 0.61: LOWER2.PIN11 23.15,18.76 18.15,23.76 18.15,64.5 22.15,68.5 33.15,68.5 41.15,60.5 46.15,60.5 52.85,67.2 v69.95,67.2 v74.35,67.2
  other vias: 26.15,18.76
V5  (via drill 0.35)  (1 unrouted)
  Top 0.61: D1.A2-1 69.95,148.09 69.95,147.27 | D1.A2-2 69.95,148.1 v69.95,147.2 | D3.A1-2 74.35,148.1 | 74.35,148.1 v74.35,147.2 | D3.A1-1 73.72,148.73 74.35,148.1
  Bottom 0.61: LOWER1.PIN11 23.15,98.76 18.15,103.76 18.15,144.5 22.15,148.5 33.15,148.5 41.15,140.5 46.15,140.5 52.85,147.2 v69.95,147.2 v74.35,147.2
  other vias: 26.15,98.76
VBACKUP  (via drill 0.4, 0.45)  (1 unrouted)
  Top 0.203: v46.02,144.3 46.02,130.4 U$1.P$4
  Bottom 0.203: v46.02,144.3 47.44,144.3 55.28,152.15 88.84,152.15 90.97,150.02 v91.29,150.02
VBACKUP1  (via drill 0.4, 0.45)  (1 unrouted)
  Top 0.203: v46.02,64.3 46.02,50.4 U$6.P$4
  Bottom 0.203: v46.02,64.3 47.44,64.3 55.28,72.15 88.84,72.15 90.97,70.02 v91.29,70.02
WIFI_3V1
  Top 0.203: 25.62,53.18 U$8.5 27.12,51.46 27.17,51.51 | 25.62,53.18 25.62,55.15 U3.23 | C18.1 27.17,51.51 | 27.17,51.51 C14.+ | 24.55,53.18 22.51,53.18 U3.20 17.07,58.62 17.07,67.81 17.3,68.04 U3.10 | 24.55,53.18 25.62,53.18 | U3.22 24.54,53.19 24.55,53.18
WIFI_3V3
  Top 0.203: 25.62,133.18 U$3.5 27.12,131.46 27.17,131.51 | 25.62,133.18 25.62,135.15 U1.23 | C6.1 27.17,131.51 | 27.17,131.51 C1.+ | 24.55,133.18 22.51,133.18 U1.20 17.07,138.62 17.07,147.81 17.3,148.04 U1.10 | 24.55,133.18 25.62,133.18 | U1.22 24.54,133.19 24.55,133.18
WIFI_CS  (via drill 0.3, 0.4)
  Top 0.203: v27.22,138.33 31.74,142.86 35.46,142.86 45.76,153.15 49.13,153.15 v49.68,152.61 | U1.16 19.99,141.94 v20.45,142.4
  Bottom 0.203: UPPER1.PIN13 107.02,151.84 105.7,150.52 104.94,149.76 92.56,149.76 89.76,152.56 55.11,152.56 54.4,151.84 51,151.84 50.24,152.61 v49.68,152.61 | v20.45,142.4 20.65,142.6 21.15,142.6 25.42,138.33 v27.22,138.33
  other vias: 109.07,153.9
WIFI_CS1  (via drill 0.3, 0.4)
  Top 0.203: v27.22,58.33 31.74,62.86 35.46,62.86 45.76,73.15 49.13,73.15 v49.68,72.61 | U3.16 19.99,61.94 v20.45,62.4
  Bottom 0.203: UPPER2.PIN13 107.02,71.84 105.7,70.52 104.94,69.76 92.56,69.76 89.76,72.56 55.11,72.56 54.4,71.84 51,71.84 50.24,72.61 v49.68,72.61 | v20.45,62.4 20.65,62.6 21.15,62.6 25.42,58.33 v27.22,58.33
  other vias: 109.07,73.9
WIFI_ENABLE
  Top 0.203: LOWER1.PIN5 38.85,102.29 39.85,101.29 39.85,97.47 40.67,96.66 49.97,96.66 50.73,97.41 50.73,112.89 41.02,122.6 31.36,122.6 25.19,128.77 24.06,128.77 U$3.3 22.68,128.97 R3.2
WIFI_ENABLE1
  Top 0.203: LOWER2.PIN5 38.85,22.29 39.85,21.29 39.85,17.47 40.67,16.66 49.97,16.66 50.73,17.41 50.73,32.89 41.02,42.6 31.36,42.6 25.19,48.77 24.06,48.77 U$8.3 22.68,48.97 R13.2
WIFI_IRQ  (via drill 0.35)  (1 unrouted)
  Top 0.203: U1.13 21.46,144.99 22.25,145.79 36.09,145.79 45.3,154.99 v45.3,155.08
  Bottom 0.203: v111.61,154.6 111.59,154.59 103.03,154.59 102.78,154.38 53.6,154.38 52.84,155.14 45.36,155.14 v45.3,155.08
WIFI_IRQ1  (via drill 0.35)  (1 unrouted)
  Top 0.203: U3.13 21.46,64.99 22.25,65.79 36.09,65.79 45.3,74.99 v45.3,75.08
  Bottom 0.203: v111.61,74.6 111.59,74.59 103.03,74.59 102.78,74.39 53.6,74.39 52.84,75.14 45.36,75.14 v45.3,75.08
WIFI_RST  (via drill 0.4)  (1 unrouted)
  Top 0.203: v44.96,142.32 33.8,142.32 33.31,141.83 U1.4
  Bottom 0.203: v44.96,142.32 46.04,142.32 55.46,151.74 88.61,151.74 91.01,149.34 108.11,149.34 v109.05,148.41
  Bottom 0.254: 45.06,142.32 v44.96,142.32
WIFI_RST1  (via drill 0.4)  (1 unrouted)
  Top 0.203: v44.96,62.32 33.8,62.32 33.31,61.83 U3.4
  Bottom 0.203: v44.96,62.32 46.04,62.32 55.46,71.74 88.61,71.74 91.01,69.34 108.11,69.34 v109.05,68.41
  Bottom 0.254: 45.06,62.32 v44.96,62.32
WIFI_WAKE  (via drill 0.35, 0.4)
  Top 0.203: U1.11 21.26,147.02 22.09,146.19 35.9,146.19 38.56,148.85 v38.56,149.33 | UPPER1.PIN7 105.63,149.5 105.61,149.49 105.16,149.94 105.16,155.89 104.4,156.64 v103.47,156.64
  Bottom 0.203: v38.56,149.33 38.56,150.15 44.18,155.77 52.81,155.77 53.73,154.84 102.58,154.84 103.47,155.73 v103.47,156.64
WIFI_WAKE1  (via drill 0.35, 0.4)
  Top 0.203: U3.11 21.26,67.02 22.09,66.19 35.9,66.19 38.56,68.85 v38.56,69.33 | UPPER2.PIN7 105.63,69.5 105.61,69.48 105.16,69.94 105.16,75.89 104.4,76.64 v103.47,76.64
  Bottom 0.203: v38.56,69.33 38.56,70.14 44.18,75.77 52.81,75.77 53.73,74.84 102.58,74.84 103.47,75.73 v103.47,76.64
XBTN  (via drill 0.35)
  Top 0.152: 84.22,124.88 R8.2 | BTN-JST.- 98.45,158.3
  Top 0.254: BACKPLANE.P4 75.25,114.41 v75.15,114.5 75.17,114.52 75.17,119.54 80.51,124.88 84.22,124.88 | R8.2 85.09,124.89 88.35,124.89 102.71,139.25 102.71,156.64 101.05,158.3 98.45,158.3
  Bottom 0.203: v75.15,114.5 73.44,116.18 67.18,116.18 57.69,106.69 44.49,106.69 42.03,104.22 42.03,99.74 LOWER1.PIN17
  other vias: 41.39,99.1
XBTN1  (via drill 0.35)
  Top 0.152: 84.22,44.88 R18.2 | BTN-JST1.- 98.45,78.3
  Top 0.254: BACKPLANE1.P4 75.25,34.41 v75.15,34.5 75.17,34.52 75.17,39.54 80.51,44.88 84.22,44.88 | R18.2 85.09,44.89 88.35,44.89 102.71,59.25 102.71,76.64 101.05,78.3 98.45,78.3
  Bottom 0.203: v75.15,34.5 73.44,36.18 67.18,36.18 57.69,26.69 44.49,26.69 42.03,24.22 42.03,19.74 LOWER2.PIN17
  other vias: 41.39,19.1

## Text on the board
Top: DARWIN+RADIO+PA3
tPlace: SOLAR | SOLAR
tNames: BTN | OFF|ON | BATTERY | WIFI | GPS | BTN | OFF|ON | BATTERY | WIFI | GPS
_tNames: C7 | R5 | C9 | U2 | RX2 | C8 | R1 | C11 | R2 | RX1 | U6 | C13 | FB1 | C1 | Q2 | C4 | C12 | R3 | C6 | C3 | C10 | C5 | C2 | R4 | R8 | R10 | R9 | R7 | R6 | C7 | R5 | C9 | U2 | RX2 | C8 | R1 | C11 | R2 | RX1 | U6 | C13 | FB1 | C1 | Q2 | C4 | C12 | R3 | C6 | C3 | C10 | C5 | C2 | R4 | R8 | R10 | R9 | R7 | R6